# Altium PCB LMAT_AMT_V4.PcbDoc (part 1 of 2)
Units mm, origin at the board's own origin, x right, y up, seen from the top; angles counter-clockwise.
Board outline 36.5 x 40.75 mm, 4 copper layers (Top Layer, PWR, GND, Bottom Layer), stack 1.572 mm thick; 123 components, 51 nets, 267 pads, 150 vias.
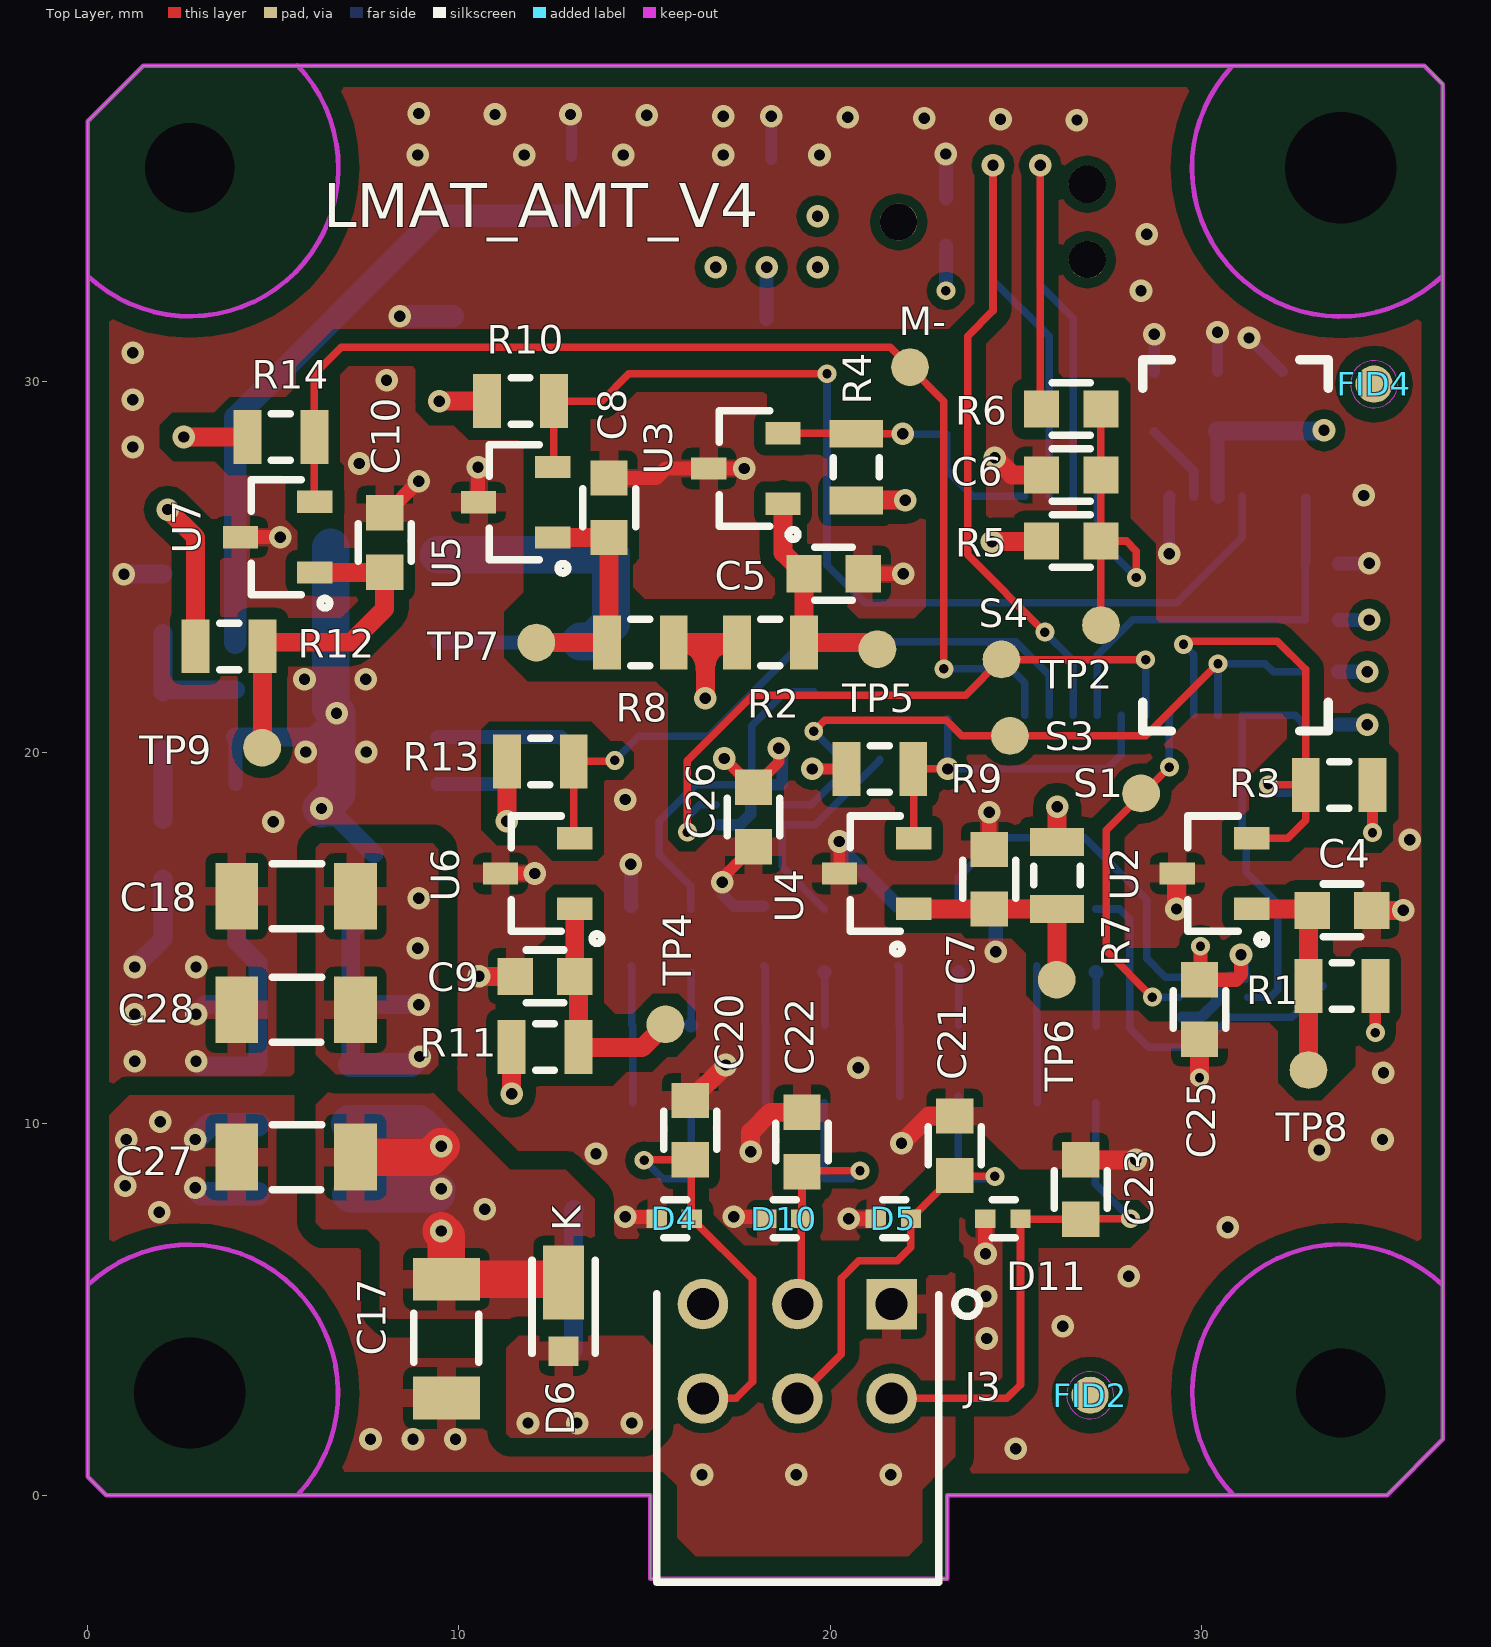
[diagram p0: Top Layer view]
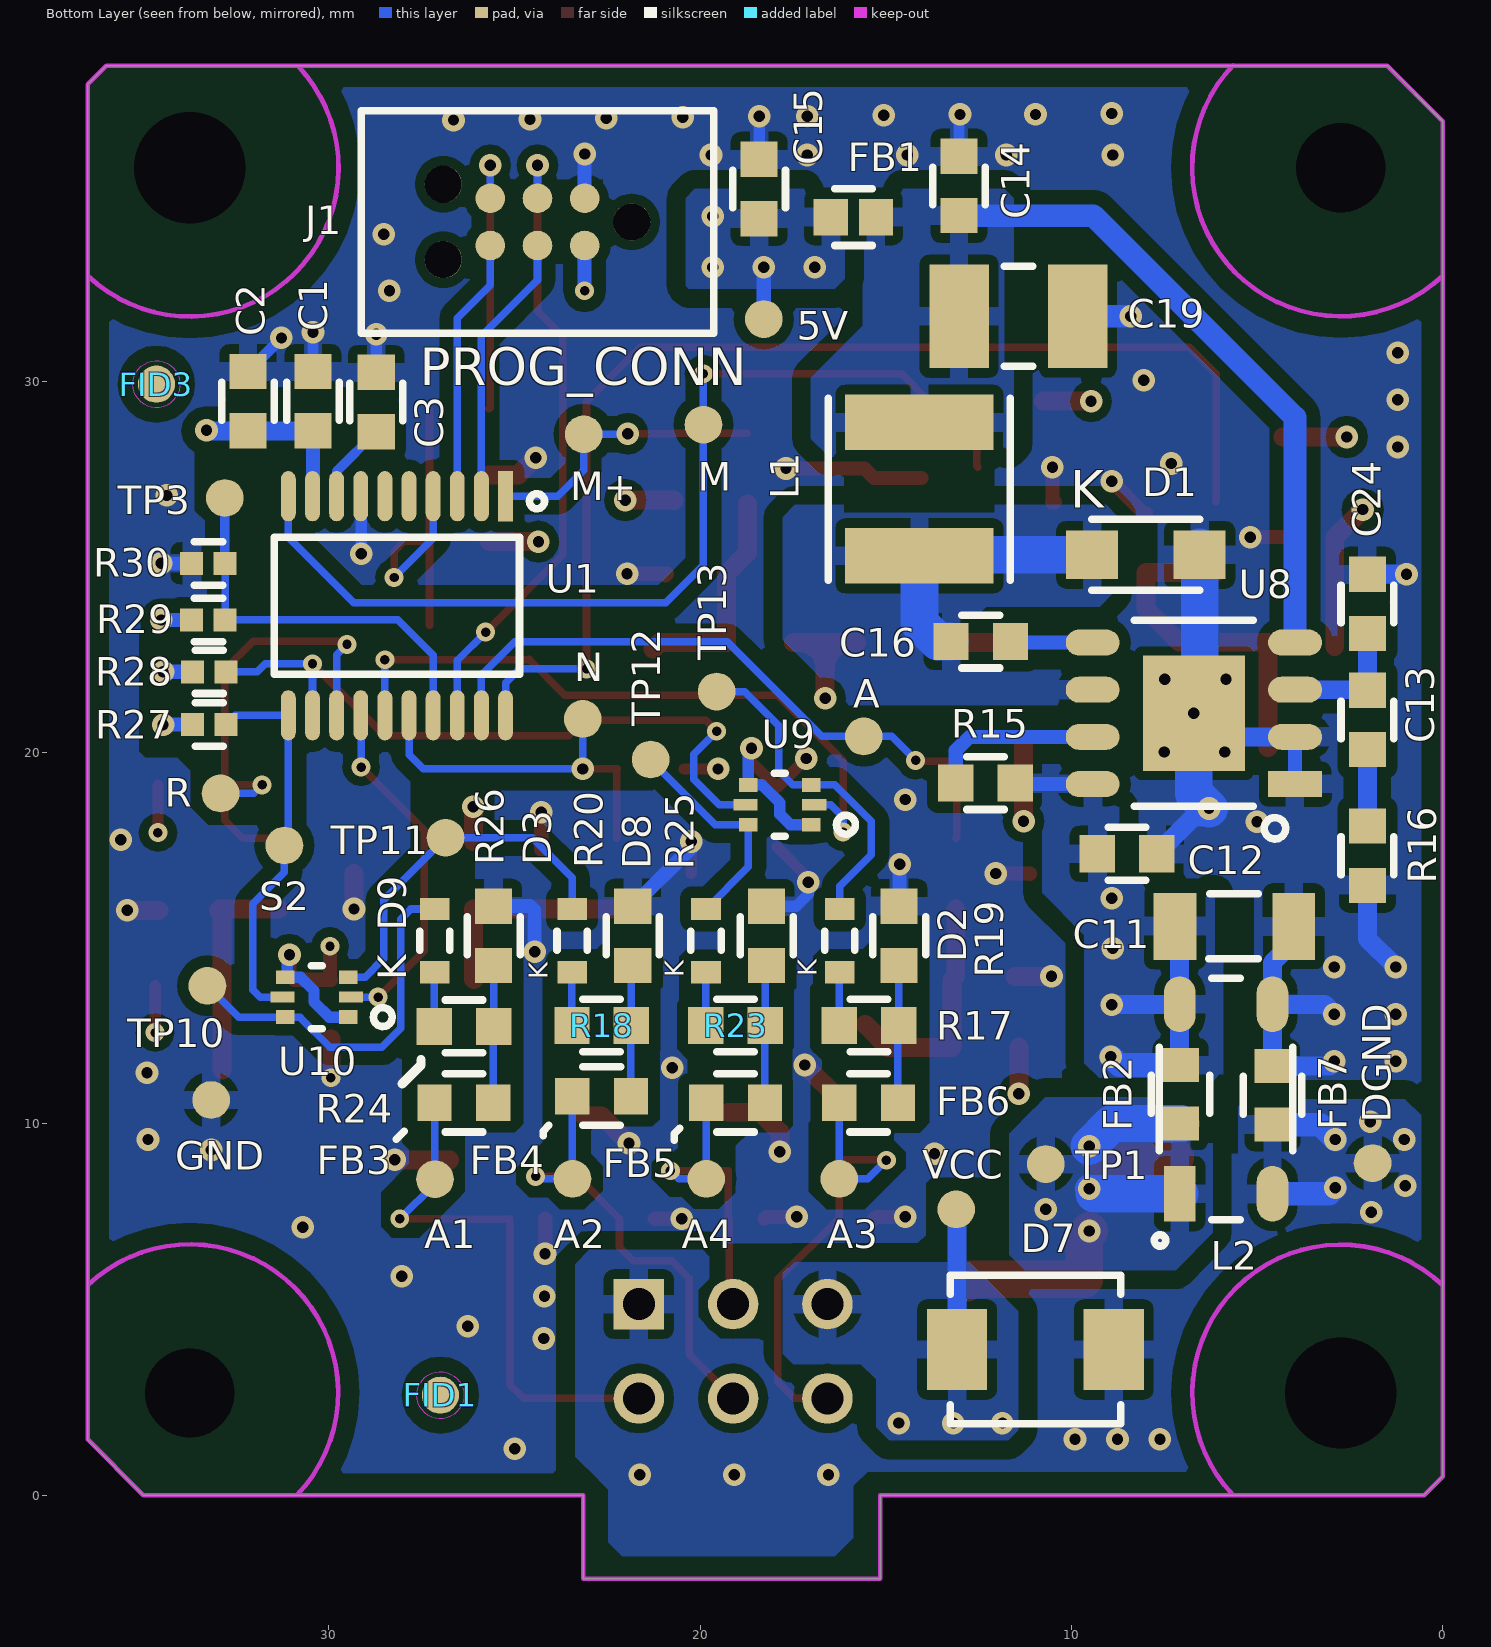
[diagram p1: Bottom Layer view, seen from below]
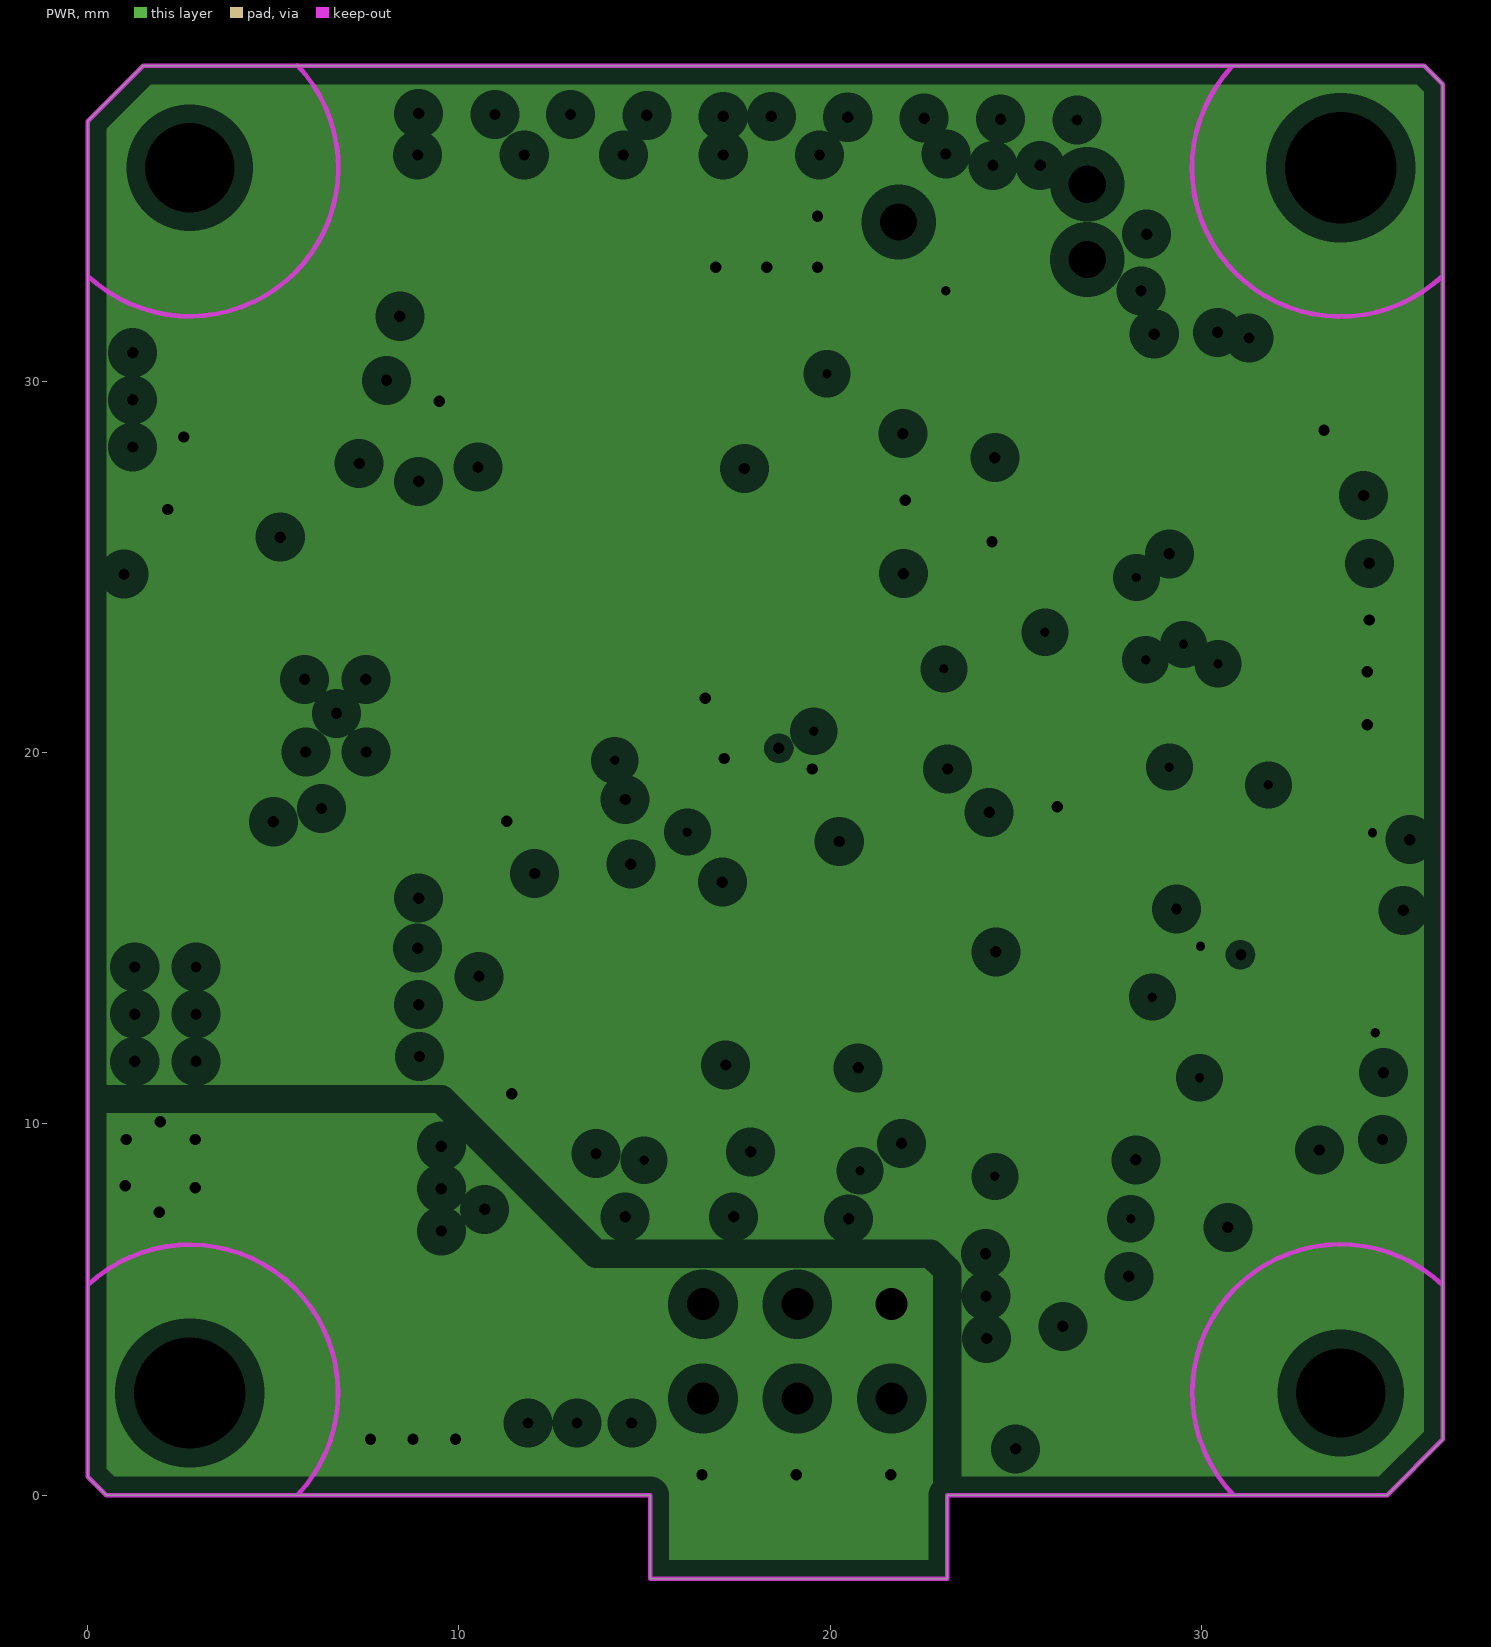
[diagram p2: PWR, clearances drawn from the general rule]
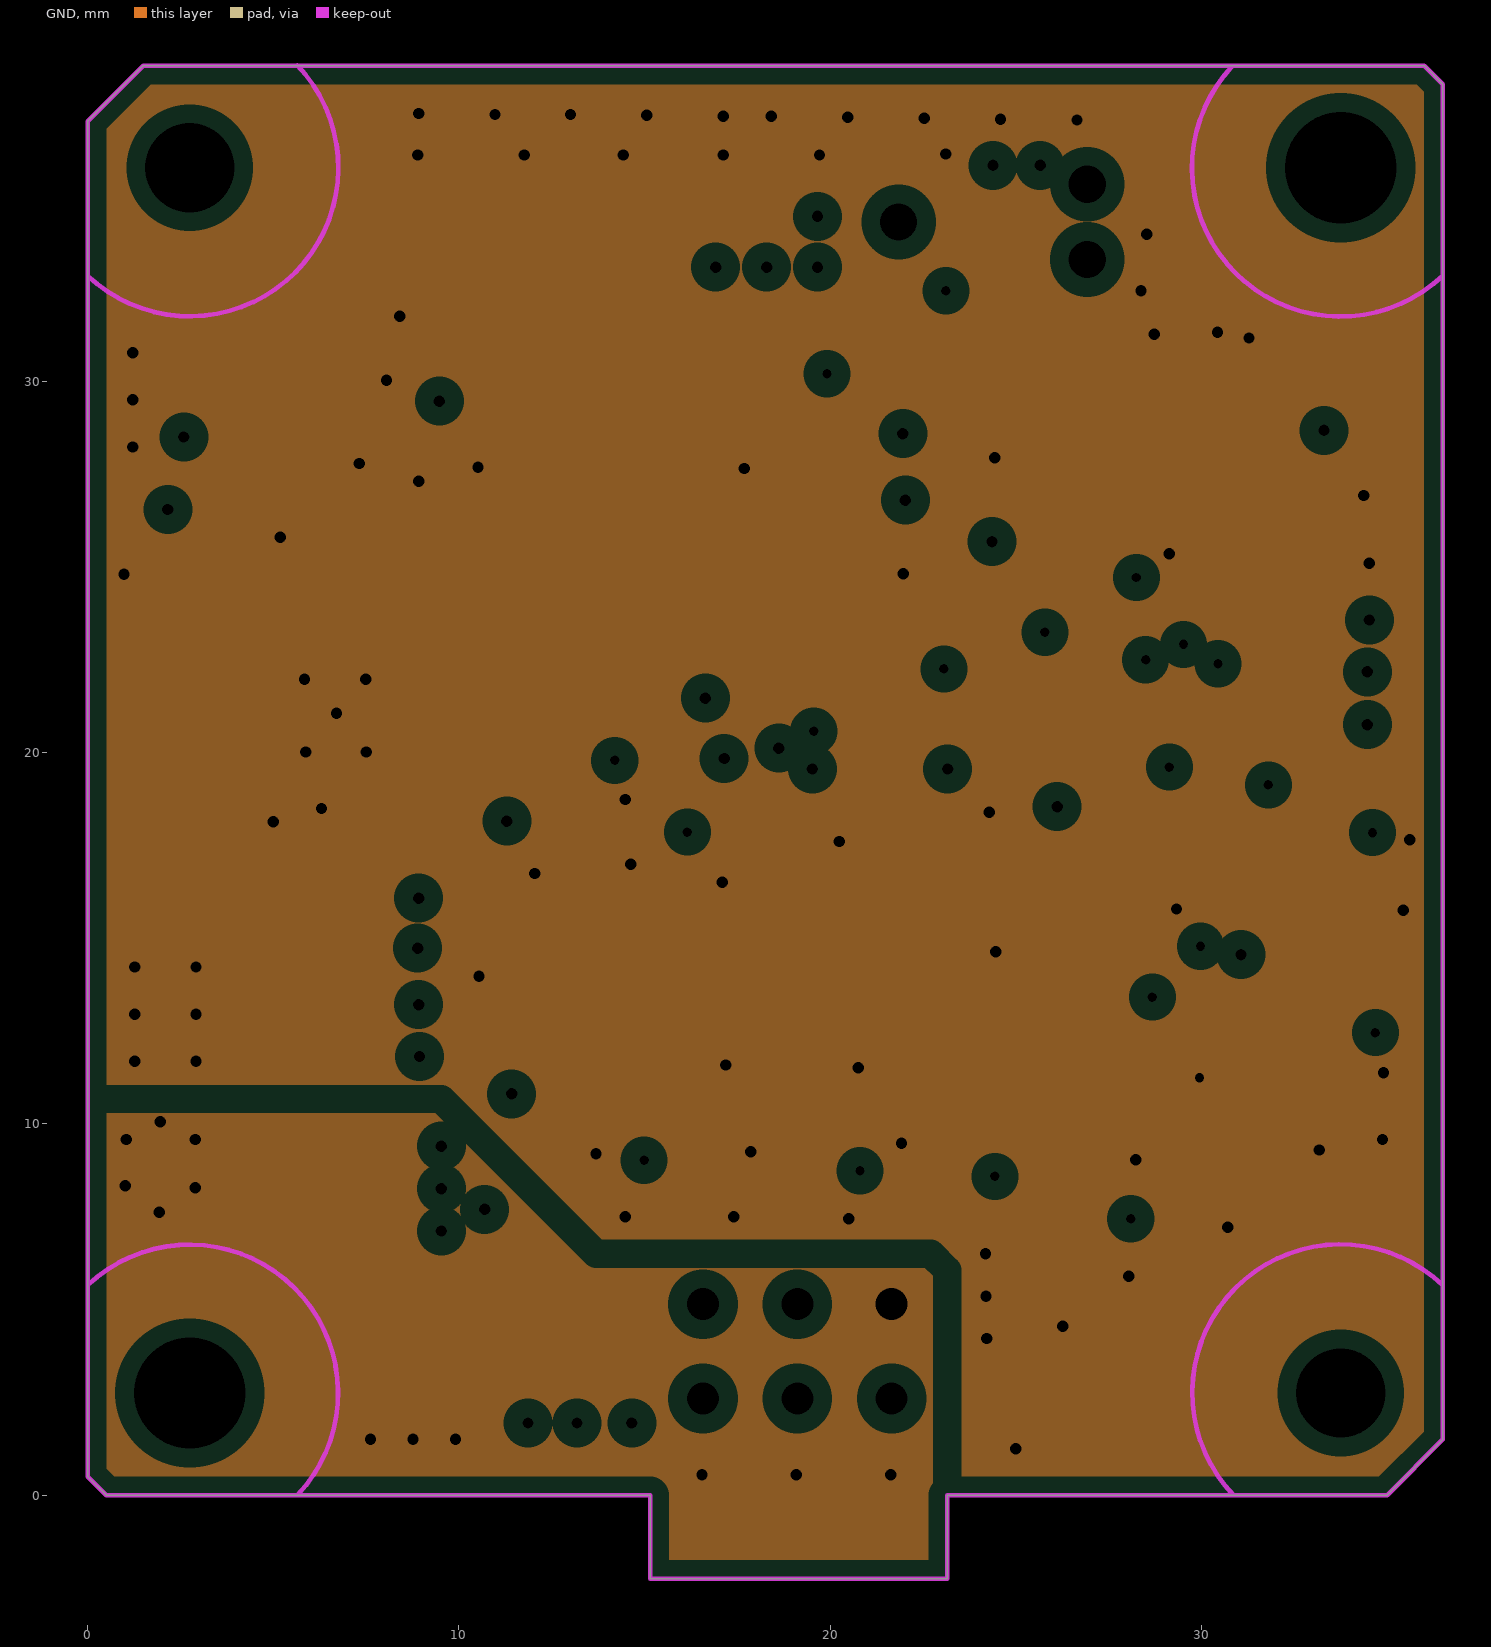
[diagram p3: GND, clearances drawn from the general rule]
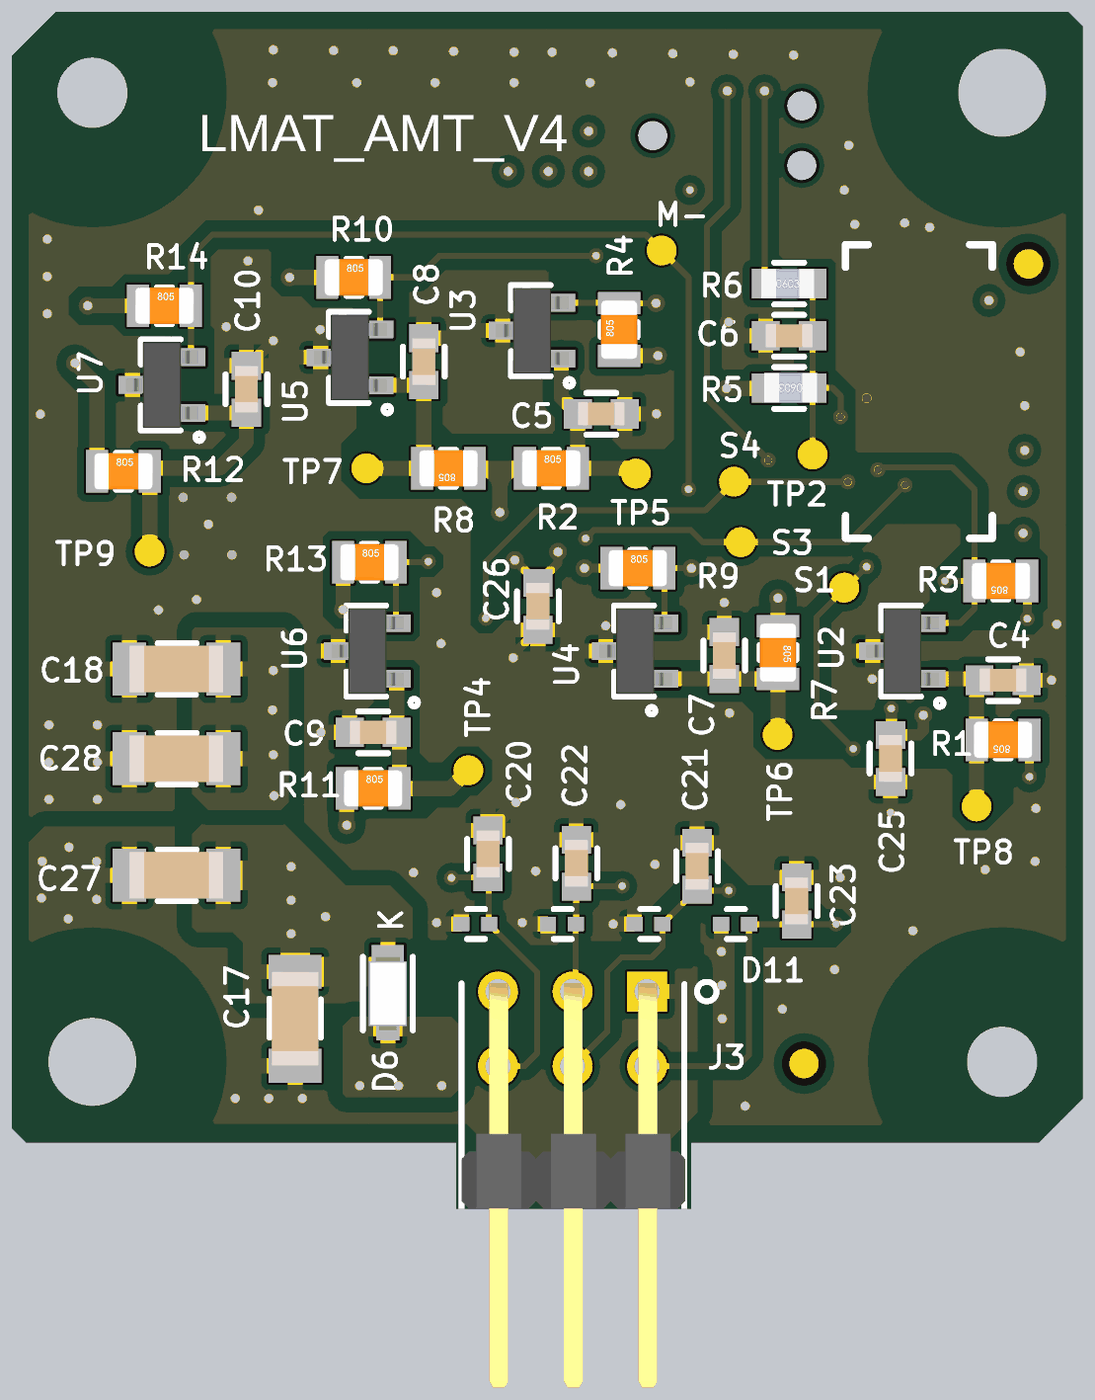
[diagram p5: 3D render of the assembled board from above, using the file's embedded part models]
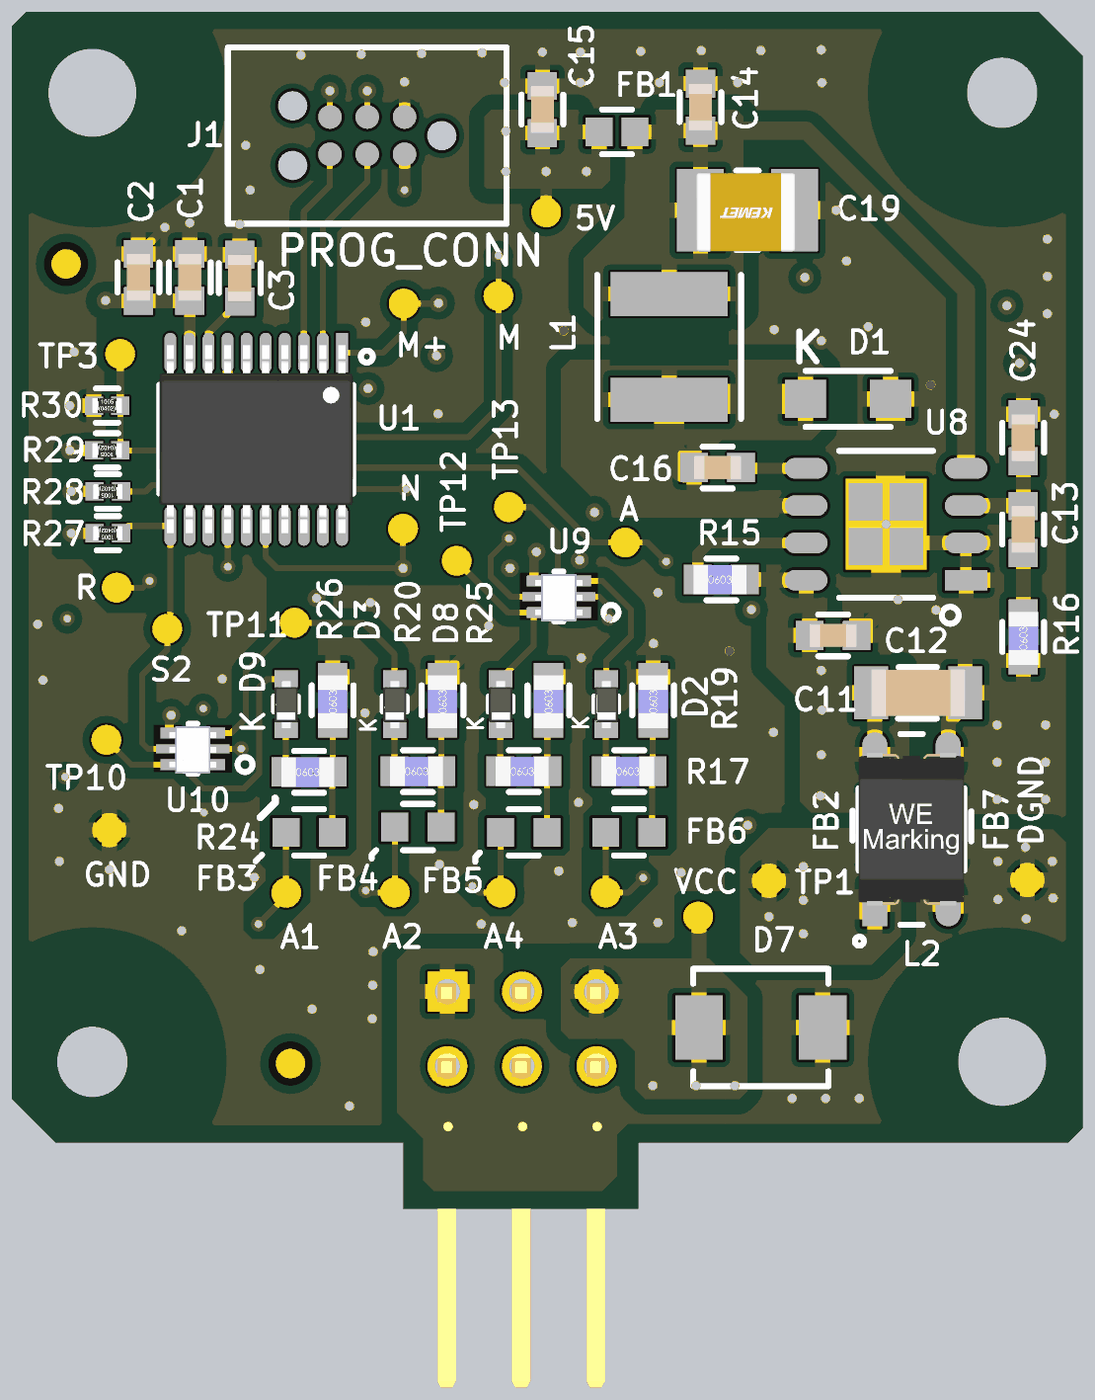
[diagram p6: 3D render of the assembled board from below, using the file's embedded part models]

## Layer stack, top to bottom
Top Solder: solder mask 0.02, Solder Resist, Dk 3.5
Top Layer: signal copper 0.035
Dielectric 1: prepreg 0.128, PP-006, Dk 4.2
Dielectric 2: prepreg 0.088, Dk 4.2
PWR: plane copper 0.035, net VCC_5V
Dielectric 3: core 1, FR-4, Dk 4.2
GND: plane copper 0.035, net GND
Dielectric 4: prepreg 0.088, PP-006, Dk 4.2
Dielectric 5: prepreg 0.128, Dk 4.2
Bottom Layer: signal copper 0.035
Bottom solder: solder mask 0.02, Solder Resist, Dk 3.5

## Board outline
0,0.5 0.5,0 15.15,0 15.15,-2.25 23.15,-2.25 23.15,0 35,0 36.5,1.5 36.5,38 36,38.5 1.5,38.5 0,37

## Design rules (kind name [scope] priority, off if disabled: settings)
AcuteAngle [All] p1: minimum=6.00000000000000E+0001 checktracksonly=TRUE
Clearance Clearance_keepout [(OnLayer('Keep-Out Layer'))] p1: gap=0.762 ignorepadtopadclearanceinfootprint=TRUE except(0: Arc-Text Arc-Hole Track-Text Track-Hole SMDPad-Text SMDPad-Hole THPad-Text THPad-Hole Via-Text Via-Hole Fill-Text Fill-Hole Poly-Text Poly-Hole Region-Text Region-Hole Text-Text Text-Hole; 0.254: Arc-Track Arc-SMDPad Arc-THPad Arc-Via Track-Track Track-SMDPad Track-THPad Track-Via SMDPad-Region; 0.381: Arc-Arc; 0.508: Arc-Poly Track-Poly; 0.635: Fill-Fill Poly-Poly)
Clearance [All] p2: gap=0.381 ignorepadtopadclearanceinfootprint=TRUE except(0: Arc-Hole Track-Hole SMDPad-Hole THPad-Hole Via-Hole Fill-Hole Poly-Hole Region-Hole Text-Hole; 0.203: Track-SMDPad SMDPad-Via; 0.254: Arc-Track Track-Track Track-Via Track-Region SMDPad-SMDPad SMDPad-Region THPad-Poly THPad-Region Via-Poly Via-Region; 0.305: SMDPad-Poly; 0.508: Poly-Poly)
ComponentClearance Choke [HasFootprint('EMS_744212331') vs HasFootprint('SMDL0603')] p1: gap=0 collisioncheckmode=3 verticalgap=0 showdistances=FALSE
ComponentClearance [All] p2: gap=0.508 collisioncheckmode=3 verticalgap=0.508 showdistances=FALSE
FanoutControl Fanout_Default [All] p1: bgadir=Out bgaviamode=Centered fanoutstyle=Auto fanoutdirection=Alternating viagrid=0.025 // Fanout_Default (Default Rule)
Height Bottom [All] p1: minheight=0 maxheight=5.5 prefheight=5
Height TOP [All] p2: minheight=0 maxheight=1.6 prefheight=1.5
Height [All] p3: minheight=0 maxheight=10 prefheight=5
HoleSize [All] p1: absolutevalues=TRUE maxlimit=25.4 minlimit=0.025 maxpercent=80.000 minpercent=20.000
HoleToHoleClearance [All] p1 off: gap=0.254 allowstackedmicrovias=TRUE
LayerPairs [All] p1 off: enforce=TRUE
MinimumAnnularRing [All] p1: minimumring=0.127
MinimumSolderMaskSliver "MinimumSolderMaskSliver_U9 and U10" [HasFootprint('SOTFL50P160X60-6N-PMDT670UPE,115')] p1: minsoldermaskwidth=0.043
MinimumSolderMaskSliver [All] p2: minsoldermaskwidth=0.076
PlaneClearance [All] p1: clearance=0.508
PlaneConnect [All] p1: planeconnectstyle=Direct reliefexpansion=0.508 reliefentries=4 reliefconductorwidth=0.254 reliefairgap=0.254
PolygonConnect C16_2 [IsNamedPolygon('NETC16_2_L04_P203')] p1: thpad.connectstyle=Relief thpad.reliefconductorwidth=0.254 thpad.reliefentries=4 thpad.polygonreliefangle="90 Angle" thpad.airgapwidth=0.254 smdpad.connectstyle=Relief smdpad.reliefconductorwidth=0.762 smdpad.reliefentries=4 smdpad.polygonreliefangle="90 Angle" smdpad.airgapwidth=0.254 via.connectstyle=Direct via.reliefconductorwidth=0.254 via.reliefentries=4 via.polygonreliefangle="90 Angle" via.airgapwidth=0.254
PolygonConnect PolygonConnect_Via [IsVia] p2: connectstyle=Direct reliefconductorwidth=0.254 reliefentries=4 polygonreliefangle="90 Angle" airgapwidth=0.254
PolygonConnect [All] p3: connectstyle=Relief reliefconductorwidth=0.508 reliefentries=4 polygonreliefangle="90 Angle" airgapwidth=0.254
RoutingVias [InNetClass('All Nets')and not InNetClass('PWR')] p1: holewidth=0.254 width=0.508 viastyle="Through Hole" minholewidth=0.254 minwidth=0.508 maxholewidth=0.508 maxwidth=1.016
RoutingVias RoutingVias_PWR [InNetClass('PWR')] p2: holewidth=0.305 width=0.61 viastyle="Through Hole" minholewidth=0.254 minwidth=0.508 maxholewidth=0.305 maxwidth=0.61
SilkToSilkClearance [All] p1: silktosilkclearance=0.076
SilkToSolderMaskClearance FB [HasFootprint('SMDL0603')] p1: minsilkscreentomaskgap=0 clearancetoexposedcopper=TRUE
SilkToSolderMaskClearance [IsPad] p2: minsilkscreentomaskgap=0.076 clearancetoexposedcopper=TRUE
SolderMaskExpansion [All] p1: expansion=0.102
UnpouredPolygon [All] p1: allowunpoured=TRUE allowshelved=TRUE
Width Width_PWR [InNetClass('PWR')] p1: maxlimit=1.27 minlimit=0.305 preferedwidth=0.381
Width [All] p2: maxlimit=5.08 minlimit=0.203 preferedwidth=0.381
14 further rules are at their usual default settings.

## Components (designator, comment, footprint, x,y, rotation, side; value= is the part's Value field where it differs from the comment)
5V "Test Point- 35mil" TP_40X40 18.288,31.674 r180 bottom locked
A "Test Point- 35mil" TP_40X40 15.596,20.434 r90 bottom locked
A1 "Test Point- 35mil" TP_40X40 27.144,8.509 r180 bottom locked
A2 "Test Point- 35mil" TP_40X40 23.442,8.517 r180 bottom locked
A3 "Test Point- 35mil" TP_40X40 16.256,8.517 r180 bottom locked
A4 "Test Point- 35mil" TP_40X40 19.837,8.517 r180 bottom locked
C1 "CAP CER 0.1UF 50V 10% X7R 0603" SMDC0603 30.429,29.464 r90 bottom locked value=0.1uF
C2 "CAP CER 1UF 25V X7R 0603" SMDC0603 32.182,29.464 r270 bottom locked value=1µF
C3 "CAP CER 1UF 25V X7R 0603" SMDC0603 28.727,29.439 r90 bottom locked value=1µF
C4 "CAP CER 0.047UF 50V X7R 0603" SMDC0603 33.782,15.748 r180 top locked value=0.047µF
C5 "CAP CER 0.047UF 50V X7R 0603" SMDC0603 20.091,24.816 r180 top locked value=0.047µF
C6 "CAP CER 0.1UF 50V 10% X7R 0603" SMDC0603 26.492,27.475 r180 top locked value=0.1uF
C7 "CAP CER 0.047UF 50V X7R 0603" SMDC0603 24.282,16.586 r270 top locked value=0.047µF
C8 "CAP CER 0.047UF 50V X7R 0603" SMDC0603 14.046,26.594 r270 top locked value=0.047µF
C9 "CAP CER 0.047UF 50V X7R 0603" SMDC0603 12.319,13.97 r0 top locked value=0.047µF
C10 "CAP CER 0.047UF 50V X7R 0603" SMDC0603 8.001,25.654 r270 top locked value=0.047µF
C11 "CAP CER 10UF 35V X7R 1206" SMDC1206 5.613,15.316 r0 bottom locked value=10uF
C12 "CAP CER 0.1UF 50V 10% X7R 0603" SMDC0603 8.509,17.272 r180 bottom locked value=0.1uF
C13 "CAP CER 0.022UF 50V 10% X7R 0603" SMDC0603 2.032,20.879 r270 bottom locked value=0.022uF
C14 "CAP CER 0.22UF 50V X7R 0603" SMDC0603 13.03,35.26 r270 bottom locked value=0.22µF
C15 "CAP CER 0.1UF 50V 10% X7R 0603" SMDC0603 18.415,35.179 r90 bottom locked value=0.1uF
C16 "CAP CER 0.22UF 50V X7R 0603" SMDC0603 12.446,22.987 r0 bottom locked value=0.22µF
C17 "CAP CER 10UF 35V X7R 1206" SMDC1206 9.661,4.216 r90 top locked value=10uF
C18 "CAP CER 10UF 35V X7R 1206" SMDC1206 5.613,16.129 r0 top locked value=10uF
C19 "CAP CER 47UF 16V X6S 1210" SMDC1210 11.43,31.75 r0 bottom locked value=47uF
C20 "CAP CER 10000PF 50V X8R 0603" SMDC0603 16.231,9.83 r270 top locked value=DNP
C21 "CAP CER 10000PF 50V X8R 0603" SMDC0603 23.355,9.41 r270 top locked value=DNP
C22 "CAP CER 10000PF 50V X8R 0603" SMDC0603 19.241,9.512 r270 top locked value=DNP
C23 "CAP CER 10000PF 50V X8R 0603" SMDC0603 26.746,8.23 r270 top locked value=DNP
C24 "CAP CER 0.022UF 50V 10% X7R 0603" SMDC0603 2.032,24.003 r90 bottom locked value=DNP
C25 "CAP CER 0.1UF 50V 10% X7R 0603" SMDC0603 29.947,13.081 r270 top locked value=0.1uF
C26 "CAP CER 0.1UF 50V 10% X7R 0603" SMDC0603 17.932,18.263 r270 top locked value=0.1uF
C27 "CAP CER 10UF 35V X7R 1206" SMDC1206 5.613,9.103 r0 top locked value=10uF
C28 "CAP CER 10UF 35V X7R 1206" SMDC1206 5.613,13.073 r0 top locked value=10uF
D1 "DIODE SCHOTTKY 40V 1A DO-219AB" SODFL370X110-2N 8.001,25.324 r180 bottom locked value=SS1FL4HM3/H
D2 "Diode Schottky 30V 100mA Surface Mount EMD2" SOD1700X70N-V2 16.243,14.935 r90 bottom locked value=RB501SM-30FHT2R
D3 "Diode Schottky 30V 100mA Surface Mount EMD2" SOD1700X70N-V2 23.451,14.935 r90 bottom locked value=RB501SM-30FHT2R
D4 "TVS DIODE 5V 17.5V SOD882T" SOD1510X40 15.799,7.442 r0 top locked value=ESDALC5-1BT2Y
D5 "TVS DIODE 5V 17.5V SOD882T" SOD1510X40 21.7,7.442 r0 top locked value=ESDALC5-1BT2Y
D6 "DIODE SCHOTTKY 150V 1A MICROSMP" "MICROSMP (DO-219AD)" 12.819,4.8 r270 top locked value=V1PM15HM3/H
D7 "TVS DIODE 23.1V 48.3V SMB" DIOM4336X26B 10.973,3.921 r0 bottom locked value=SM6T27CAY
D8 "Diode Schottky 30V 100mA Surface Mount EMD2" SOD1700X70N-V2 19.845,14.935 r90 bottom locked value=RB501SM-30FHT2R
D9 "Diode Schottky 30V 100mA Surface Mount EMD2" SOD1700X70N-V2 27.153,14.935 r90 bottom locked value=RB501SM-30FHT2R
D10 "TVS DIODE 5V 17.5V SOD882T" SOD1510X40 18.749,7.442 r0 top locked value=ESDALC5-1BT2Y
D11 "TVS DIODE 5V 17.5V SOD882T" SOD1510X40 24.65,7.442 r0 top locked value=ESDALC5-1BT2Y
DGND "Test Point- 35mil" TP_40X40 1.892,8.941 r90 bottom locked
FB1 "FERRITE BEAD 600 OHM 0603 1LN" SMDL0603#1 15.875,34.417 r0 bottom locked value="600 Ohms"
FB2 "FERRITE BEAD 600 OHM 0603 1LN" SMDL0603#2 7.061,10.795 r90 bottom locked value="600 Ohms"
FB3 "FERRITE BEAD 600 OHM 0603 1LN" SMDL0603#2 26.365,10.566 r0 bottom locked value="600 Ohms"
FB4 "FERRITE BEAD 600 OHM 0603 1LN" SMDL0603#2 22.657,10.744 r0 bottom locked value="600 Ohms"
FB5 "FERRITE BEAD 600 OHM 0603 1LN" SMDL0603#2 19.05,10.566 r0 bottom locked value="600 Ohms"
FB6 "FERRITE BEAD 600 OHM 0603 1LN" SMDL0603#2 15.469,10.566 r0 bottom locked value="600 Ohms"
FB7 "FERRITE BEAD 600 OHM 0603 1LN" SMDL0603#2 4.589,10.77 r90 bottom locked value="600 Ohms"
FID1 "FID40X40" FID40X40 27,2.692 r90 bottom locked
FID2 "FID40X40" FID40X40 27,2.692 r90 top locked
FID3 "FID40X40" FID40X40 34.646,29.921 r90 bottom locked
FID4 "FID40X40" FID40X40 34.646,29.921 r90 top locked
GND "Test Point- 35mil" TP_40X40 33.172,10.643 r90 bottom locked
J1 "J-LINK 6-PIN NEEDLE ADAPTER" "PRG_8.06.16 J-LINK 6-PIN NEEDLE ADAPTER" 24.384,34.29 r0 bottom locked value="8.06.16 J-LINK 6-PIN NEEDLE ADAPTER"
J3 "CONN HEADER R/A 6POS 2.54MM" HDRRA6W86P254_2X3_1344X254X528P_Modified 19.114,3.874 r180 top locked value=M20-9950345
L1 "FIXED IND 47UH 700MA 422.5 MOHM" INDC4949X310N 14.097,27.096 r90 bottom locked value=47UH
L2 "CMC 330UH 300MA 2LN 2 KOHM SMD" EMS_744212331 5.839,10.668 r270 bottom locked value=DNP
M "Test Point- 35mil" TP_40X40 19.914,28.829 r90 bottom locked
M+ "Test Point- 35mil" TP_40X40 23.139,28.572 r180 bottom locked
M- "Test Point- 35mil" TP_40X40 22.149,30.378 r90 top locked
N "Test Point- 35mil" TP_40X40 23.165,20.904 r90 bottom locked
R "Test Point- 35mil" TP_40X40 32.918,18.898 r180 bottom locked
R1 "RES SMD 100 OHM 1% 1/2W 0805" SMDR0805 33.782,13.716 r180 top locked value=100R
R2 "RES SMD 100 OHM 1% 1/2W 0805" SMDR0805 18.39,22.962 r0 top locked value=100R
R3 "RES SMD 1.2K OHM 5% 1/2W 0805" SMDR0805 33.706,19.126 r180 top locked value=1.2K
R4 "RES SMD 1.2K OHM 5% 1/2W 0805" SMDR0805 20.701,27.686 r90 top locked value=1.2K
R5 "RES SMD 47K OHM 1% 1/10W 0603" SMDR0603 26.492,25.697 r180 top locked value=47K
R6 "RES SMD 0.0OHM JUMPER 1/10W 0603" SMDR0603 26.492,29.253 r0 top locked value=0R
R7 "RES SMD 100 OHM 1% 1/2W 0805" SMDR0805 26.111,16.688 r270 top locked value=100R
R8 "RES SMD 100 OHM 1% 1/2W 0805" SMDR0805 14.884,22.962 r180 top locked value=100R
R9 "RES SMD 1.2K OHM 5% 1/2W 0805" SMDR0805 21.336,19.558 r0 top locked value=1.2K
R10 "RES SMD 1.2K OHM 5% 1/2W 0805" SMDR0805 11.659,29.464 r0 top locked value=1.2K
R11 "RES SMD 100 OHM 1% 1/2W 0805" SMDR0805 12.319,12.065 r0 top locked value=100R
R12 "RES SMD 100 OHM 1% 1/2W 0805" SMDR0805 3.81,22.86 r0 top locked value=100R
R13 "RES SMD 1.2K OHM 5% 1/2W 0805" SMDR0805 12.192,19.761 r0 top locked value=1.2K
R14 "RES SMD 1.2K OHM 5% 1/2W 0805" SMDR0805 5.207,28.499 r0 top locked value=1.2K
R15 "RES SMD 1M OHM 5% 1/10W 0603" SMDR0603 12.319,19.177 r180 bottom locked value=1M
R16 "RES SMD 22K OHM 1% 1/10W 0603" SMDR0603 2.032,17.221 r90 bottom locked value=22K
R17 "RES SMD 105 OHM 1% 1/10W 0603" SMDR0603 15.456,12.649 r180 bottom locked value="105 Ohms"
R18 "RES SMD 105 OHM 1% 1/10W 0603" SMDR0603 22.657,12.649 r180 bottom locked value="105 Ohms"
R19 "RES SMD 210 OHM 1% 1/10W 0603" SMDR0603 14.643,15.062 r90 bottom locked value="210 Ohms"
R20 "RES SMD 210 OHM 1% 1/10W 0603" SMDR0603 21.819,15.062 r90 bottom locked value="210 Ohms"
R23 "RES SMD 105 OHM 1% 1/10W 0603" SMDR0603 19.05,12.649 r180 bottom locked value="105 Ohms"
R24 "RES SMD 105 OHM 1% 1/10W 0603" SMDR0603 26.365,12.624 r180 bottom locked value="105 Ohms"
R25 "RES SMD 210 OHM 1% 1/10W 0603" SMDR0603 18.212,15.062 r90 bottom locked value="210 Ohms"
R26 "RES SMD 210 OHM 1% 1/10W 0603" SMDR0603 25.565,15.062 r90 bottom locked value="210 Ohms"
R27 "RES SMD 10K OHM 5% 1/10W 0402" SMDR0402 33.223,20.752 r0 bottom locked value=10K
R28 "RES SMD 10K OHM 5% 1/10W 0402" SMDR0402 33.223,22.174 r0 bottom locked value=10K
R29 "RES SMD 4.7K OHM 1% 1/10W 0402" SMDR0402 33.249,23.571 r0 bottom locked value=4.7K
R30 "RES SMD 4.7K OHM 1% 1/10W 0402" SMDR0402 33.249,25.095 r180 bottom locked value=DNP
S1 "Test Point- 35mil" TP_40X40 28.372,18.898 r0 top locked
S2 "Test Point- 35mil" TP_40X40 31.2,17.496 r180 bottom locked
S3 "Test Point- 35mil" TP_40X40 24.841,20.447 r0 top locked
S4 "Test Point- 35mil" TP_40X40 24.613,22.508 r0 top locked
TP1 "Test Point- 35mil" TP_40X40 10.693,8.915 r90 bottom locked
TP2 "Test Point- 35mil" TP_40X40 27.292,23.431 r90 top locked
TP3 "Test Point- 35mil" TP_40X40 32.804,26.854 r90 bottom locked
TP4 "Test Point- 35mil" TP_40X40 15.562,12.679 r90 top locked
TP5 "Test Point- 35mil" TP_40X40 21.271,22.784 r270 top locked
TP6 "Test Point- 35mil" TP_40X40 26.098,13.88 r90 top locked
TP7 "Test Point- 35mil" TP_40X40 12.086,22.962 r90 top locked
TP8 "Test Point- 35mil" TP_40X40 32.88,11.449 r270 top locked
TP9 "Test Point- 35mil" TP_40X40 4.699,20.127 r90 top locked
TP10 "Test Point- 35mil" TP_40X40 33.274,13.716 r270 bottom locked
TP11 "Test Point- 35mil" TP_40X40 26.86,17.704 r270 bottom locked
TP12 "Test Point- 35mil" TP_40X40 21.336,19.812 r90 bottom locked
TP13 "Test Point- 35mil" TP_40X40 19.558,21.641 r90 bottom locked
U1 "IC MCU 8BIT 8KB FLASH 20TSSOP" SOP65P640X120-20N 28.169,23.952 r270 bottom locked value=STM8AF6223PCU
U2 "MAGNETIC SWITCH UNIPOLAR SOT23-3" SOT95P248X115-3N 30.35,16.74 r180 top locked value=TLE49641MXTSA1
U3 "MAGNETIC SWITCH UNIPOLAR SOT23-3" SOT95P248X115-3N 17.73,27.65 r180 top locked value=TLE49641MXTSA1
U4 "MAGNETIC SWITCH UNIPOLAR SOT23-3" SOT95P248X115-3N 21.25,16.74 r180 top locked value=TLE49641MXTSA1
U5 "MAGNETIC SWITCH UNIPOLAR SOT23-3" SOT95P248X115-3N 11.53,26.74 r180 top locked value=TLE49641MXTSA1
U6 "MAGNETIC SWITCH UNIPOLAR SOT23-3" SOT95P248X115-3N 12.12,16.74 r180 top locked value=TLE49641MXTSA1
U7 "MAGNETIC SWITCH UNIPOLAR SOT23-3" SOT95P248X115-3N 5.12,25.8 r180 top locked value=TLE49641MXTSA1
U8 "IC REG BUCK 5V 1.8A 8DSO" SOIC127P600X170_HS-9N 6.706,21.057 r0 bottom locked value=TLE8366EV50XUMA1
U9 "MOSFET 2P-CH 20V 0.55A SOT666" SOTFL50P160X60-6N-PMDT670UPE,115 17.855,18.593 r0 bottom locked value=PMDT670UPE,115
U10 "MOSFET 2P-CH 20V 0.55A SOT666" SOTFL50P160X60-6N-PMDT670UPE,115 30.327,13.411 r0 bottom locked value=PMDT670UPE,115
VCC "Test Point- 35mil" TP_40X40 13.106,7.696 r90 bottom locked

## Footprints (in the part's own frame and the unit in brackets; to place one, negate y for a bottom-side part, rotate by r counter-clockwise, add the part's x,y. Pads: shape width x height; smd on the part's side, far side on the other; paste and mask are expansions set on the pad)
DIOM4336X26B [mm] "Molded Diode, 2-Leads, Body 4.32x3.63mm, IPC Low Density"
  rect 1.62x2.18 smd: 1(-2.11,0) 2(2.11,0)
  silkscreen extent -2.3,-2 2.3,2, body extent -2.52,-1.97 2.52,1.97, height 2.65
EMS_744212331 [mm]
  rect 1.5x0.85 smd mask+0.102: 1(2.55,-1.25)
  oval 1.5x0.85 smd mask+0.102: 3(2.55,1.25) 4(-2.55,1.25) 5(-2.55,-1.25)
  silkscreen extent -3.25,-1.93 3.96,1.8, body extent -2.6,-1.8 2.6,1.8, height 1.7
FID40X40 [mm]
  round 1 smd paste-2 mask+0.254: 0(0,0)
  Top Layer keep-out circle w0.025: c0,0 r0.635
HDRRA6W86P254_2X3_1344X254X528P_Modified [mm] "CONN HEADER R/A 6POS 2.54MM"
  rect 1.36x1.36 hole 0.86 mask+0.076: 1(-2.54,-1.27)
  round 1.36 hole 0.86 mask+0.076: 2(0,-1.27) 3(2.54,-1.27) 4(-2.54,1.27) 5(0,1.27) 6(2.54,1.27)
  silkscreen extent -4.9,-1.6 3.78,6.22, body extent -3.84,-1.55 3.78,12.21, height 5.08
INDC4949X310N [mm] "NRS5030T2R2NMGJ,FIXED IND 6.8UH 2.3A 52 MOHM SMD"
  rect 1.5x4 smd mask+0.076: 1(-1.8,0) 2(1.8,0)
  Top Layer pour cut-out: -0.635,2.032 0.635,2.032 0.635,-2.032 -0.635,-2.032
  silkscreen extent -2.45,-2.45 2.45,2.45, body extent -2.45,-2.45 2.45,2.45, height 3.1
"MICROSMP (DO-219AD)" [mm] "DIODE SCHOTTKY 150V 1A MICROSMP"
  rect 2x1.1 smd: 1(-0.925,0)
  rect 0.8x0.8 smd: 2(0.925,0)
  silkscreen extent -1.52,-0.85 0.98,0.85, body extent -1.53,-0.65 0.98,0.65, height 0.69
"PRG_8.06.16 J-LINK 6-PIN NEEDLE ADAPTER" [mm]
  round 1 hole 1 unplated: 0(-2.54,0) 0(2.54,1.016) 0(2.54,-1.016)
  round 0.8 smd: 1(-1.27,-0.635) 2(-1.27,0.635) 3(0,-0.635) 4(0,0.635) 5(1.27,-0.635) 6(1.27,0.635)
  Top Layer pour cut-out: -1.778,-1.143 -1.778,1.143 1.778,1.143 1.778,-1.143
  silkscreen extent -4.75,-3 4.75,3
SMDC0603 [mm]
  rect 0.95x1 smd mask+0.076: 1(-0.8,0) 2(0.8,0)
  Top Layer pour cut-out: -0.203,0.559 -0.203,-0.584 0.203,-0.584 0.203,0.559
  silkscreen extent -0.51,-0.71 0.51,0.71, body extent -0.8,-0.4 0.8,0.4, height 0.81
SMDC1206 [mm]
  rect 1.15x1.8 smd mask+0.076: 1(-1.6,0) 2(1.6,0)
  Top Layer pour cut-out: -0.533,0.889 0.533,0.889 0.533,-0.914 -0.533,-0.914
  silkscreen extent -0.64,-0.87 0.69,0.87, body extent -1.6,-0.8 1.6,0.8, height 0.79
SMDC1210 [mm] "GRM32ER71A476KE15L, CAP CER 47UF 10V X7R 1210"
  rect 1.6x2.8 smd mask+0.076: 1(-1.6,0) 2(1.6,0)
  Top Layer pour cut-out: -0.508,1.35 0.381,1.35 0.381,-1.35 -0.508,-1.35
  silkscreen extent -0.38,-1.35 0.38,1.35, body extent -1.65,-1.29 1.75,1.41, height 1.41
SMDL0603#1 [mm] "Chip Inductor, 2-Leads, Body 1.60x0.80mm, IPC Medium Density"
  rect 0.92x0.98 smd: 1(-0.61,0) 2(0.61,0)
  silkscreen extent -0.51,-0.76 0.51,0.76, body extent -0.87,-0.48 0.87,0.48, height 1
SMDL0603#2 [mm] "Chip Inductor, 2-Leads, Body 1.60x0.80mm, IPC Medium Density"
  rect 0.92x0.98 smd: 1(-0.79,0) 2(0.79,0)
  silkscreen extent -0.51,-0.79 0.51,0.79, body extent -0.87,-0.48 0.87,0.48, height 1
SMDR0402 [mm]
  rect 0.62x0.62 smd mask+0.076: 1(-0.45,0) 2(0.45,0)
  Top Layer pour cut-out: -0.102,0.381 0.076,0.381 0.076,-0.381 -0.102,-0.381
  silkscreen extent -0.38,-0.58 0.38,0.58, body extent -0.5,-0.25 0.5,0.25, height 0.35
SMDR0603 [mm]
  rect 0.95x1 smd mask+0.076: 1(-0.8,0) 2(0.8,0)
  Top Layer pour cut-out: -0.254,0.61 0.254,0.61 0.254,-0.61 -0.254,-0.61
  silkscreen extent -0.51,-0.71 0.51,0.71, body extent -0.95,-0.5 0.85,0.5, height 0.32
SMDR0805 [mm]
  rect 0.75x1.45 smd mask+0.076: 1(-0.9,0) 2(0.9,0)
  Top Layer pour cut-out: -0.381,0.787 0.406,0.787 0.406,-0.762 0.381,-0.787 -0.381,-0.787
  silkscreen extent -0.25,-0.63 0.25,0.63, body extent -1,-0.62 1,0.63, height 0.78
SOD1510X40 [mm]
  rect 0.55x0.5 smd mask+0.076: 1(-0.475,0) 2(0.475,0)
  silkscreen extent -0.28,-0.51 0.33,0.51, body extent -0.53,-0.32 0.53,0.32, height 0.4
SOD1700X70N-V2 [mm]
  rect 0.6x0.8 smd mask+0.076: 1(-0.85,0) 2(0.85,0)
  silkscreen extent -0.25,-0.41 0.25,0.41, body extent -0.82,-0.41 0.78,0.39, height 0.7
SODFL370X110-2N [mm] "SODFL, 2-Leads, Body 1.80x3.70mm, IPC Medium Density"
  rect 1.4x1.3 smd: 1(1.45,0) 2(-1.45,0)
  Top Layer pour cut-out: -0.395,-0.95 -0.395,0.95 0.316,0.95 0.316,-0.95
  silkscreen extent -1.45,-0.96 1.45,0.96, body extent -1.85,-0.95 1.85,0.95, height 1.1
SOIC127P600X170_HS-9N [mm] "SOIC, 8-Leads, Body 4.90x3.90mm, Pitch 1.27mm, Thermal Pad 3.10x2.75mm, IPC Medium Density"
  rect 1.45x0.7 smd: 1(-2.725,1.905)
  oval 1.45x0.7 smd: 2(-2.725,0.635) 3(-2.725,-0.635) 4(-2.725,-1.905) 5(2.725,-1.905) 6(2.725,-0.635) 7(2.725,0.635) 8(2.725,1.905)
  rect 2.75x3.1 smd paste-3 mask+0.102: 9(0,0)
  silkscreen extent -2.47,-2.5 1.6,3.39, body extent -3,-2.5 3,2.5, height 1.7
SOP65P640X120-20N [mm] "TSOP, 20-Leads, Body 6.50x4.40mm, Pitch 0.65mm, IPC Medium Density"
  rect 1.35x0.4 smd mask+0.076: 1(-2.95,2.925)
  oval 1.35x0.4 smd mask+0.076: 2(-2.95,2.275) 3(-2.95,1.625) 4(-2.95,0.975) 5(-2.95,0.325) 6(-2.95,-0.325) 7(-2.95,-0.975) 8(-2.95,-1.625) 9(-2.95,-2.275) 10(-2.95,-2.925) 11(2.95,-2.925) 12(2.95,-2.275) 13(2.95,-1.625) 14(2.95,-0.975) 15(2.95,-0.325) 16(2.95,0.325) 17(2.95,0.975) 18(2.95,1.625) 19(2.95,2.275) 20(2.95,2.925)
  silkscreen extent -3.02,-3.3 1.85,3.97, body extent -3.2,-3.3 3.2,3.3, height 1.2
SOT95P248X115-3N [mm] "SOT23, 3-Leads, Body 2.95x2.48mm, Pitch 0.95mm, IPC Medium Density"
  rect 0.95x0.6 smd: 1(-1,0.95) 2(-1,-0.95) 3(1,0)
  silkscreen extent -1.4,-1.55 0.71,1.9, body extent -1.25,-1.46 1.23,1.46, height 1.03
SOTFL50P160X60-6N-PMDT670UPE,115 [mm] "SOTFL, 6-Leads, Body 1.60x1.60mm, Pitch 0.50mm, IPC Medium Density"
  rect 0.5x0.375 smd mask+0.076: 1(-0.85,0.538) 3(-0.85,-0.537) 4(0.85,-0.537) 6(0.85,0.538)
  rect 0.65x0.3 smd mask+0.076: 2(-0.925,0) 5(0.925,0)
  silkscreen extent -2.03,-0.85 0.15,0.85, body extent -0.8,-0.76 0.8,0.84, height 0.57
TP_40X40 [mil]
  round 40 smd paste-200 mask+3: 1(0,0)

## Part data
5V A A1 A2 A3 A4 DGND GND M M+ M- N R S1 S2 S3 S4 TP1 TP2 TP3 TP4 TP5 TP6 TP7 TP8 TP9 TP10 TP11 TP12 TP13 VCC: library part EMS-TP35MIL-S, Internal Part Number=EMS-TP35MIL-S, Part Type="Test Point- 35mil"
C1 C6 C12 C15 C25 C26: library part ECA0U10K50V0-SC, Manufacturer="TDK Corporation", Manufacturer Part Number=CGA3E2X7R1H104K080AA, Temp Co=X7R, Vendor Part Number=445-5666-1-ND, 1st Auxiliary Field=50V, 2nd Auxiliary Field=±10%, 3rd Auxiliary Field="RoHS Compliant", Component Height (mm)=0.90mm, Internal Part Number=ECA0U10K50V0-SC, Part Type="CAP CER 0.1UF 50V X7R 0603", Vendor Name=Digi-Key
C2 C3: library part ECA1U00L25V0-SC, Manufacturer="TDK Corporation", Manufacturer Part Number=CGA3E1X7R1E105K080AE, Temp Co="-55°C ~ 125°C", Vendor Part Number=445-173628-1-ND, 1st Auxiliary Field=25V, 2nd Auxiliary Field=±10%, 3rd Auxiliary Field="RoHS Compliant", Component Height (mm)=0.95mm, Internal Part Number=ECA1U00L25V0-SC, Part Type="CAP CER 1UF 25V X7R 0603", Vendor Name=Digi-Key
C4 C5 C7 C8 C9 C10: library part ECA47N0L50V-SC, Manufacturer="TDK Corporation", Manufacturer Part Number=CGA3E2X7R1H473K080AA, Temp Co="-55°C ~ 125°C", Vendor Part Number=445-5664-1-ND, 1st Auxiliary Field=50V, 2nd Auxiliary Field=±10%, 3rd Auxiliary Field="RoHS Compliant", Component Height (mm)=0.9mm, Internal Part Number=ECA47N0L50V-SC, Part Type="CAP CER 0.047UF 50V X7R 0603", Vendor Name=Digi-Key
C11 C17 C18 C27 C28: library part ECA10U0L35V0-SG, Manufacturer="TDK Corporation", Manufacturer Part Number=CGA5L1X7R1V106K160AC, Temp Co="-55°C ~ 125°C", Vendor Part Number=445-174428-1-ND, 1st Auxiliary Field=35V, 2nd Auxiliary Field=±10%, 3rd Auxiliary Field="RoHS Compliant", 4th Auxiliary Field=AEC-Q200, Component Height (mm)=1.80mm, Internal Part Number=ECA10U0L35V0-SG, Part Type="CAP CER 10UF 35V X7R 1206", Vendor Name=Digi-Key
C13 C24: library part ECA0U022K50V0-SC, Manufacturer="TDK Corporation", Manufacturer Part Number=CGA3E2X7R1H223K080AA, Temp Co=X7R, Vendor Part Number=445-5663-1-ND, 1st Auxiliary Field=50V, 2nd Auxiliary Field=±10%, Component Height (mm)=0.90mm, Internal Part Number=ECA0U022K50V0-SC, Part Type="CAP CER 0.022UF 50V X7R 0603", Vendor Name=Digi-Key
C14 C16: library part ECA0U22L50V0-SC, Manufacturer="Murata Electronics North America", Manufacturer Part Number=GCJ188R71H224KA01D, Temp Co="-55°C ~ 125°C", Vendor Part Number=490-14410-1-ND, 1st Auxiliary Field=50V, 2nd Auxiliary Field=±10%, 3rd Auxiliary Field="RoHS Compliant", Component Height (mm)=0.90mm, Internal Part Number=ECA0U22L50V0-SC, Part Type="CAP CER 0.22UF 50V X7R 0603", Vendor Name=Digi-Key
C19: library part ECA47U0L16V0-SH, Manufacturer="Murata Electronics North America", Manufacturer Part Number=GRT32EC81C476KE13L, Temp Co="-55°C ~ 105°C", Vendor Part Number=490-12494-1-ND, 1st Auxiliary Field=16V, 2nd Auxiliary Field=±10%, 3rd Auxiliary Field="RoHS Compliant", 4th Auxiliary Field=AEC-Q200, Component Height (mm)=2.70mm, Internal Part Number=ECA47U0L16V0-SH, Part Type="CAP CER 47UF 16V X6S 1210", Vendor Name=Digi-Key
C20 C21 C22 C23: library part ECA0U01L50V0-SC, Manufacturer="TDK Corporation", Manufacturer Part Number=CGA3E2X8R1H103K080AA, Temp Co="-55°C ~ 150°C", Vendor Part Number=445-5892-1-ND, 1st Auxiliary Field=50V, 2nd Auxiliary Field=±10%, 3rd Auxiliary Field="RoHS Compliant", 4th Auxiliary Field=AEC-Q200, Component Height (mm)=0.80mm, Internal Part Number=ECA0U01L50V0-SC, Part Type="CAP CER 10000PF 50V X8R 0603", Vendor Name=Digi-Key
D1: library part EDDVS1A0040V0-S, Manufacturer="Vishay Semiconductor Diodes Division", Manufacturer Part Number=SS1FL4HM3/H, Temp Co="-55°C ~ 150°C", Vendor Part Number=SS1FL4HM3/HGICT-ND, 1st Auxiliary Field=40V, 2nd Auxiliary Field=1A, 3rd Auxiliary Field="RoHS Compliant", Component Height (mm)=1.08mm, Internal Part Number=EDDVS1A0040V0-S, Part Type="DIODE SCHOTTKY 40V 1A DO-219AB", Vendor Name=Digi-Key
D2 D3 D8 D9: library part EDDR0A1030V0-S, Manufacturer="Rohm Semiconductor", Manufacturer Part Number=RB501SM-30FHT2R, Temp Co="125°C (Max)", Vendor Part Number=RB501SM-30FHT2RCT-ND, 1st Auxiliary Field=30V, 2nd Auxiliary Field=100mA, 3rd Auxiliary Field="RoHS Compliant", Component Height (mm)=0.70mm, Internal Part Number=EDDR0A1030V0-S, Part Type="Diode Schottky 30V 100mA Surface Mount EMD2", Vendor Name=Digi-Key
D4 D5 D10 D11: library part EDDST9A005V00-S, Manufacturer=STMicroelectronics, Manufacturer Part Number=ESDALC5-1BT2Y, Temp Co="-50°C ~ 125°C (TJ)", Vendor Part Number=497-14998-1-ND, 1st Auxiliary Field=5V, 2nd Auxiliary Field=9A, 3rd Auxiliary Field="RoHS Compliant", 4th Auxiliary Field=AEC-Q101, Component Height (mm)=0.40mm, Internal Part Number=EDDST9A005V00-S, Part Type="TVS DIODE 5V 17.5V SOD882T", Vendor Name=Digi-Key
D6: library part EDDVS1A00150V-S, Manufacturer="Vishay Semiconductor Diodes Division", Manufacturer Part Number=V1PM15HM3/H, Temp Co="-40°C ~ 175°C", Vendor Part Number=V1PM15HM3/HGICT-ND, 1st Auxiliary Field=150V, 2nd Auxiliary Field=1A, 3rd Auxiliary Field="RoHS Compliant", 4th Auxiliary Field=AEC-Q101, Component Height (mm)=0.73mm, Internal Part Number=EDDVS1A00150V-S, Part Type="DIODE SCHOTTKY 150V 1A MICROSMP", Vendor Name=Digi-Key
D7: library part EDDST83A025V7-S, Manufacturer=STMicroelectronics, Manufacturer Part Number=SM6T27CAY, Temp Co="-55°C ~ 150°C (TJ)", Vendor Part Number=497-10798-1-ND, 1st Auxiliary Field=25.7V, 2nd Auxiliary Field=600W, 3rd Auxiliary Field="RoHS Compliant", Component Height (mm)=2.65mm, Internal Part Number=EDDST83A025V7-S, Part Type="TVS DIODE 23.1V 48.3V SMB", Vendor Name=Digi-Key
FB1 FB2 FB3 FB4 FB5 FB6 FB7: library part EIN600R1A00-SC, Manufacturer="Würth Elektronik", Manufacturer Part Number=782633601, Temp Co="-55°C ~ 125°C", Vendor Part Number=732-6703-1-ND, 1st Auxiliary Field=1A, 2nd Auxiliary Field="600 Ohms @ 100MHz", 3rd Auxiliary Field="ROHS3 Compliant", 4th Auxiliary Field=AEC-Q200, Component Height (mm)=1.00mm, Internal Part Number=EIN600R1A00-SC, Part Type="FERRITE BEAD 600 OHM 0603 1LN", Vendor Name=Digi-Key
FID1 FID2 FID3 FID4: library part FID_40X40
J1: library part "EMS-8.06.16 J-LINK 6-PIN NEEDLE ADAPTER", Manufacturer="Segger Microcontroller Systems", Manufacturer Part Number="8.06.16 J-LINK 6-PIN NEEDLE ADAPTER", Vendor Part Number=899-1051-ND, 1st Auxiliary Field=J-Link, 3rd Auxiliary Field="RoHS Compliant", Internal Part Number="EMS-8.06.16 J-LINK 6-PIN NEEDLE ADAPTER", Part Type="J-LINK 6-PIN NEEDLE ADAPTER", Vendor Name=Digi-Key
J3: library part ECN-M20-9950345-0003-0060, Manufacturer="Harwin Inc.", Manufacturer Part Number=M20-9950345, Temp Co="-40°C ~ 105°C", Vendor Part Number=952-2092-ND, 1st Auxiliary Field=6pos, 2nd Auxiliary Field="2 rows", 3rd Auxiliary Field="RoHS Compliant", Component Height (mm)=5.08mm, Internal Part Number=ECN-M20-9950345-0003-0060, Part Type="CONN HEADER R/A 6POS 2.54MM", Vendor Name=Digi-Key
L1: library part EIN47U0N950M-S, Manufacturer="Taiyo Yuden", Manufacturer Part Number=NRS5030T470MMGJV, Temp Co="-40°C ~ 125°C", Vendor Part Number=587-3604-1-ND, 1st Auxiliary Field=950mA, 2nd Auxiliary Field=±20%, 3rd Auxiliary Field="RoHS Compliant", 4th Auxiliary Field=AEC-Q200, Component Height (mm)=3.00mm, Internal Part Number=EIN47U0N950M-S, Part Type="FIXED IND 47UH 700MA 422.5 MOHM", Vendor Name=Digi-Key
L2: library part EIN330U300M-S, Manufacturer="Würth Elektronik", Manufacturer Part Number=744212331, Temp Co="-40°C ~ 105°C", Vendor Part Number=732-3939-1-ND, 1st Auxiliary Field=300mA, 2nd Auxiliary Field="330µH @ 100kHz", 3rd Auxiliary Field="ROHS3 Compliant", Component Height (mm)=1.8mm, Internal Part Number=EIN330U300M-S, Part Type="CMC 330UH 300MA 2LN 2 KOHM SMD", Vendor Name=Digi-Key
R1 R2 R7 R8 R11 R12: library part ERE100RG120-SE, Manufacturer="Panasonic Electronic Components", Manufacturer Part Number=ERJ-P06F1000V, Temp Co="-55°C ~ 155°C", Vendor Part Number=P16057CT-ND, 1st Auxiliary Field=0.5W, 2nd Auxiliary Field=±1%, 3rd Auxiliary Field="RoHS Compliant", 4th Auxiliary Field=AEC-Q200, Component Height (mm)=0.70mm, Internal Part Number=ERE100RG120-SE, Part Type="RES SMD 100 OHM 1% 1/2W 0805", Vendor Name=Digi-Key
R3 R4 R9 R10 R13 R14: library part ERE1K20G102-SE, Manufacturer="Panasonic Electronic Components", Manufacturer Part Number=ERJ-P06J122V, Temp Co="-55°C ~ 155°C", Vendor Part Number=P1.2KADCT-ND, 1st Auxiliary Field=0.5W, 2nd Auxiliary Field=±5%, 3rd Auxiliary Field="RoHS Compliant", Component Height (mm)=0.70mm, Internal Part Number=ERE1K20G102-SE, Part Type="RES SMD 1.2K OHM 5% 1/2W 0805", Vendor Name=Digi-Key
R5: library part ERE47K0G110-SC, Manufacturer=Yageo, Manufacturer Part Number=AT0603FRE0747KL, Temp Co="-55°C ~ 155°C", Vendor Part Number=YAG2129CT-ND, 1st Auxiliary Field=0.1W, 2nd Auxiliary Field=±1%, 3rd Auxiliary Field="RoHS Compliant", Component Height (mm)=0.55mm, Internal Part Number=ERE47K0G110-SC, Part Type="RES SMD 47K OHM 1% 1/10W 0603", Vendor Name=Digi-Key
R6: library part ERE0R00110-SC, Manufacturer="Panasonic Electronic Components", Manufacturer Part Number=ERJ-3GEY0R00V, Vendor Part Number=P0.0GCT-ND, 1st Auxiliary Field=0.1W, 2nd Auxiliary Field=Jumper, Component Height (mm)=0.55mm, Internal Part Number=ERE0R00110-SC, Part Type="RES SMD 0.0OHM JUMPER 1/10W 0603", Vendor Name=Digi-Key
R15: library part ERE1M00K110-SC, Manufacturer="Vishay Dale", Manufacturer Part Number=RCA06031M00JNEA, Temp Co="-55°C ~ 155°C", Vendor Part Number=541-2216-1-ND, 1st Auxiliary Field=0.1W, 2nd Auxiliary Field=±5%, 3rd Auxiliary Field="RoHS Compliant", 4th Auxiliary Field=AEC-Q200, Component Height (mm)=0.50mm, Internal Part Number=ERE1M00K110-SC, Part Type="RES SMD 1M OHM 5% 1/10W 0603", Vendor Name=Digi-Key
R16: library part ERE22K0G110-SC, Manufacturer="Panasonic Electronic Components", Manufacturer Part Number=ERJ-3EKF2202V, Temp Co="-55°C ~ 155°C", Vendor Part Number=P22.0KHCT-ND, 1st Auxiliary Field=0.1W, 2nd Auxiliary Field=±1%, 3rd Auxiliary Field="RoHS Compliant", 4th Auxiliary Field=AEC-Q200, Component Height (mm)=0.55mm, Internal Part Number=ERE22K0G110-SC, Part Type="RES SMD 22K OHM 1% 1/10W 0603", Vendor Name=Digi-Key
R17 R18 R23 R24: library part ERE105RG110-SC, Manufacturer="Panasonic Electronic Components", Manufacturer Part Number=ERJ-3EKF1050V, Temp Co="-55°C ~ 155°C", Vendor Part Number=P105HCT-ND, 1st Auxiliary Field=0.1W, 2nd Auxiliary Field=±1%, 3rd Auxiliary Field="RoHS Compliant", 4th Auxiliary Field=AEC-Q200, Component Height (mm)=0.55mm, Internal Part Number=ERE105RG110-SC, Part Type="RES SMD 105 OHM 1% 1/10W 0603", Vendor Name=Digi-Key
R19 R20 R25 R26: library part ERE210RG110-SC, Manufacturer="Panasonic Electronic Components", Manufacturer Part Number=ERJ-3EKF2100V, Temp Co="-55°C ~ 155°C", Vendor Part Number=P210HCT-ND, 1st Auxiliary Field=0.1W, 2nd Auxiliary Field=±1%, 3rd Auxiliary Field="RoHS Compliant", 4th Auxiliary Field=AEC-Q200, Component Height (mm)=0.55mm, Internal Part Number=ERE210RG110-SC, Part Type="RES SMD 210 OHM 1% 1/10W 0603", Vendor Name=Digi-Key
R27 R28: library part ERE10K0K110-SB, Manufacturer="Panasonic Electronic Components", Manufacturer Part Number=ERJ-2GEJ103X, Temp Co=±200ppm/°C, Vendor Part Number=P10KJCT-ND, 1st Auxiliary Field=0.1W, 2nd Auxiliary Field=±5%, 3rd Auxiliary Field="RoHS Compliant", Component Height (mm)=0.40mm, Internal Part Number=ERE10K0K110-SB, Part Type="RES SMD 10K OHM 5% 1/10W 0402", Vendor Name=Digi-Key
R29 R30: library part ERE4K70G110-SB, Alternate Part number=RK73H1ETTP4701F, Manufacturer="Panasonic Electronic Components", Manufacturer Part Number=ERJ-2RKF4701X, Temp Co=±100ppm/°C, Vendor Part Number=P4.70KLCT-ND, 1st Auxiliary Field=0.1W, 2nd Auxiliary Field=±1%, 3rd Auxiliary Field="RoHS Compliant", 4th Auxiliary Field=AEC-Q200, Component Height (mm)=0.40mm, Internal Part Number=ERE4K70G110-SB, Part Type="RES SMD 4.7K OHM 1% 1/10W 0402", Vendor Name=Digi-Key
U1: library part EICSTMTSSOP-20-1691, Manufacturer=STMicroelectronics, Manufacturer Part Number=STM8AF6223PCU, Temp Co="-40°C ~ 125°C (TA)", Vendor Part Number=497-17896-ND, 1st Auxiliary Field="3V ~ 5.5V", 2nd Auxiliary Field=8-Bit, 3rd Auxiliary Field="RoHS Compliant", Component Height (mm)=1.2mm, Internal Part Number=EICSTMTSSOP-20-1691, Part Type="IC MCU 8BIT 8KB FLASH 20TSSOP", Vendor Name=Digi-Key
U2 U3 U4 U5 U6 U7: library part EICITSOT23-3-1528, Manufacturer="Infineon Technologies", Manufacturer Part Number=TLE49641MXTSA1, Temp Co="-40°C ~ 170°C (TJ)", Vendor Part Number=TLE49641MXTSA1CT-ND, 1st Auxiliary Field="3 V ~ 32 V", 2nd Auxiliary Field=2.5mA, 3rd Auxiliary Field="RoHS Compliant", Component Height (mm)=1.15mm, Internal Part Number=EICITSOT23-3-1528, Part Type="MAGNETIC SWITCH UNIPOLAR SOT23-3", Vendor Name=Digi-Key
U8: library part EICITSOIC-08-0001, Manufacturer="Infineon Technologies", Manufacturer Part Number=TLE8366EV50XUMA1, Temp Co="-40°C ~ 150°C (TJ)", Vendor Part Number=TLE8366EV50XUMA1CT-ND, 1st Auxiliary Field=45V, 2nd Auxiliary Field=1.8A, 3rd Auxiliary Field="RoHS Compliant", 4th Auxiliary Field=AEC-Q100, Component Height (mm)=1.7mm, Internal Part Number=EICITSOIC-08-0001, Part Type="IC REG BUCK 5V 1.8A 8DSO", Vendor Name=Digi-Key
U9 U10: library part EICNUSOT666-06-0004, Manufacturer="Nexperia USA Inc.", Manufacturer Part Number=PMDT670UPE,115, Temp Co="-55°C ~ 150°C (TJ)", Vendor Part Number=1727-1334-1-ND, 1st Auxiliary Field=20V, 2nd Auxiliary Field=550mA, 3rd Auxiliary Field="RoHS Compliant", 4th Auxiliary Field=AEC-Q101, Component Height (mm)=0.6mm, Internal Part Number=EICNUSOT666-06-0004, Part Type="MOSFET 2P-CH 20V 0.55A SOT666", Vendor Name=Digi-Key

## Free pads (board coordinates)
  round 0.102 hole 3 unplated: MH(2.75,2.75) MH(33.75,35.75)
  round 0.102 hole 2.4 unplated: MH(2.75,35.75) MH(33.75,2.75)

## Via types
v1: diameter 0.61, hole 0.305, Top Layer to Bottom Layer, tented both sides, 128 vias
v2: diameter 0.508, hole 0.254, Top Layer to Bottom Layer, tented both sides, 22 vias

## Nets (pads, with @x,y where several pads share a name; then routed paths per layer and width w, separated by ;. In a path a pad name is that pad's centre, name@x,y a point inside that pad or via, vN(x,y) a via of type N, cw(c..) or ccw(c..) an arc to the next point about the centre after c; other vN are vias at no path point)
AUTOMATIC: A.1 R13.2 U1.19 U6.2 | length 17.7
  Top Layer w0.203: U6.2@13.12,17.69 13.092,17.718 R13.2@13.092,19.761 14.173,19.761 v2(14.199,19.787)
  Bottom Layer w0.203: v2(14.199,19.787) 14.846,20.434 A.1@15.596,20.434 16.726,20.434 19.279,22.987 24.994,22.987 25.894,22.087 U1.19@25.894,21.002
DEBUG: R29.1 R30.2 TP3.1 U1.17 | length 10.9
  Bottom Layer w0.203: U1.17@27.194,21.002 27.194,22.622 28.143,23.571 R29.1@32.799,23.571 R30.2@32.799,25.095
  Bottom Layer w0.254: R30.2@32.799,25.095 32.804,25.101 TP3.1@32.804,26.854
DGND: C17.1 C27.1 D7.1 DGND.1 FB7.1 J3.1 L2.3 | length 3.6
  Bottom Layer w0.635: v1(2.896,8.28) 3.058,8.118 L2.3@4.589,8.118 ; v1(2.896,9.576) 3.299,9.98 FB7.1@4.589,9.98
  other v1: 16.548,0.546 19.088,0.546 21.628,0.546 7.62,1.508 8.763,1.508 9.906,1.508 1.93,7.62 1.016,8.331 1.041,9.576 1.956,10.058
GND: C1.2 C2.1 C3.2 C4.1 C5.1 C6.2 C7.1 C8.1 C9.1 C10.1 C11.1 C12.2 C14.1 C15.2 C18.1 C19.1 C20.1 C21.1 C22.1 C23.1 C24.2 C25.2 C26.2 C28.1 D1.1 D4.1 D5.1 D10.1 D11.1 FB7.2 GND.1 J1.1 L2.4 R16.1 R19.2 R20.2 R25.2 R26.2 R30.1 U1.7 U2.3 U3.3 U4.3 U5.3 U6.3 U7.3 U8.1 U8.2 U8.9 | length 70.1
  Top Layer w0.305: v1(17.094,16.51) 17.094,16.624 C26.2@17.932,17.463 ; v1(20.244,17.602) 20.244,16.746 U4.3@20.25,16.74
  Top Layer w0.381: U7.3@4.12,25.8 v1(5.188,25.8) ; C10.1@8.001,26.454 8.064,26.454 v1(8.915,27.305) ; v1(10.516,27.686) 10.516,26.81 10.446,26.74 U5.3@10.53,26.74 ; U6.3@11.125,16.735 U6.3@11.12,16.74 v1(12.041,16.74) ; C8.1@14.046,27.394 15.316,27.394 15.572,27.65 U3.3@16.73,27.65 v1(17.689,27.65) ; v1(14.478,7.493) 15.258,7.493 15.316,7.434 D4.1@15.324,7.442 ; v1(17.399,7.493) 18.224,7.493 D10.1@18.274,7.442 ; v1(20.498,7.442) D5.1@21.225,7.442 ; C5.1@20.942,24.765 C5.1@20.891,24.816 v1(21.971,24.816) ; D11.1@24.175,7.442 24.175,6.508 v1(24.181,6.502) ; C7.1@24.282,17.386 v1(24.282,18.39)
  Top Layer w0.508: v1(10.541,13.97) C9.1@11.519,13.97 ; C20.1@16.231,10.63 v1(17.183,11.582) ; v1(17.856,9.246) 17.856,9.779 18.389,10.312 C22.1@19.241,10.312 ; v1(21.92,9.474) 22.656,10.21 C21.1@23.126,10.21 ; v1(24.435,27.94) 24.9,27.475 C6.2@25.692,27.475 ; C23.1@26.746,9.03 v1(28.232,9.03) ; v1(29.326,15.787) U2.3@29.326,16.74 ; v2(29.947,11.239) C25.2@29.947,12.281 ; C4.1@34.582,15.748 v1(35.433,15.748)
  Bottom Layer w0.305: v1(13.005,37.186) 13.03,37.16 C14.1@13.03,36.06 ; v1(17.094,16.51) 17.094,16.18 17.412,15.862 R25.2@18.212,15.862 ; C15.2@18.415,35.979 v1@18.415,37.059 ; C3.2@28.727,30.239 v1(28.727,31.267) ; v1(29.134,25.349) 29.134,26.892 U1.7@29.144,26.902 ; C1.2@30.429,30.264 v1(30.429,31.318) ; v1(31.28,31.166) C2.1@32.182,30.264
  Bottom Layer w0.381: U8.1@3.981,19.152 U8.2@3.981,20.422 ; v1(14.63,16.993) 14.63,15.875 R19.2@14.643,15.862 ; v1(20.244,17.602) 20.244,17.437 R20.2@21.819,15.862 ; J1.1@23.114,34.925 v1(23.114,36.119) ; v1(24.46,14.63) 24.46,15.737 24.585,15.862 R26.2@25.565,15.862 ; R30.1@33.699,25.095 v1(34.519,25.095)
  Bottom Layer w0.508: v1(0.978,24.803) C24.2@2.032,24.803 ; v1(1.27,14.224) 2.032,14.986 R16.1@2.032,16.421 R16.1@2.032,16.599 ; v1(2.921,11.684) 3.045,11.56 FB7.2@4.589,11.56 ; v1(2.921,12.954) 3.185,13.218 L2.4@4.589,13.218 ; U8.2@3.981,20.422 6.071,20.422 v1(6.706,21.057) ; C11.1@4.013,15.316 4.013,14.91 4.589,14.334 L2.4@4.589,13.218 ; FB7.2@4.589,11.56 L2.4@4.589,13.218 ; v1@6.299,18.364 v1(6.299,18.491) ; v1@6.401,18.263 6.718,18.263 C12.2@7.709,17.272
  Bottom Layer w0.61: v1(8.407,31.75) C19.1@9.83,31.75
  Bottom Layer w1.016: v1(6.299,18.491) 6.706,18.898 v1(6.706,21.057) 6.551,21.211 D1.1@6.551,25.324 D1.1@6.551,25.527
  other v1: 24.994,1.245 24.213,4.216 26.264,4.547 24.197,5.359 28.042,5.893 30.709,7.214 13.691,9.195 33.172,9.296 34.874,9.576 34.9,11.379 20.752,11.506 1.27,11.684 1.27,12.954 2.921,14.224 35.611,17.653 5.004,18.136 14.478,18.732 5.878,20.015 7.504,20.015 5.842,21.971 7.493,21.971 34.366,26.924 7.313,27.785 1.212,28.227 1.212,29.497 8.052,30.023 1.212,30.767 28.372,32.436 28.524,33.96 8.89,36.093 11.76,36.093 14.427,36.093 17.12,36.093 19.71,36.093 26.645,37.033 24.587,37.059 22.53,37.084 20.472,37.109 17.12,37.135 18.415,37.135 15.062,37.16 10.973,37.186 8.915,37.211
M+: M+.1 R4.2 U1.1 U3.2 | length 7.8
  Top Layer w0.203: U3.2@18.73,28.6 20.687,28.6 R4.2@20.701,28.586 v1(21.957,28.586)
  Bottom Layer w0.203: v1(21.957,28.586) 21.971,28.572 M+.1@23.139,28.572 23.139,27.597 23.834,26.902 U1.1@25.244,26.902
M-: M-.1 R14.2 U1.20 U7.2 | length 31.7
  Top Layer w0.203: U7.2@6.12,26.75 6.107,26.763 R14.2@6.107,28.499 6.107,30.186 6.833,30.912 21.615,30.912 M-.1@22.149,30.378 23.063,29.464 v2(23.063,22.25)
  Bottom Layer w0.203: v2(23.063,22.25) 24.867,22.25 25.244,21.873 U1.20@25.244,21.002
MANUAL: M.1 R10.2 U1.10 U5.2 | length 28
  Top Layer w0.203: U5.2@12.53,27.69 12.559,27.719 R10.2@12.559,29.464 13.843,29.464 14.58,30.201 v2(19.914,30.201)
  Bottom Layer w0.203: v2(19.914,30.201) M.1@19.914,28.829 19.914,25.044 20.93,24.028 29.327,24.028 31.094,25.795 U1.10@31.094,26.902
NetC3_1: C3.1 U1.8 | length 2.2
  Bottom Layer w0.254: C3.1@28.727,28.639 29.794,27.572 U1.8@29.794,26.902
NetC4_2: C4.2 R1.2 TP8.1 U2.1 | length 6
  Top Layer w0.508: U2.1@31.35,15.79 32.94,15.79 C4.2@32.982,15.748 32.882,15.648 R1.2@32.882,13.716 32.882,11.451 TP8.1@32.88,11.449
NetC5_2: C5.2 R2.2 TP5.1 U3.1 | length 6.1
  Top Layer w0.508: U3.1@18.73,26.7 18.73,25.377 C5.2@19.291,24.816 R2.2@19.29,22.962 ; R2.2@19.315,22.987 R2.2@19.29,22.962 ; TP5.1@21.271,22.784 21.093,22.962 R2.2@19.29,22.962 R2.2@19.29,22.962
NetC7_2: C7.2 R7.2 TP6.1 U4.1 | length 5.8
  Top Layer w0.508: U4.1@22.25,15.79 24.279,15.79 C7.2@24.282,15.786 24.284,15.788 R7.2@26.111,15.788 26.111,13.892 TP6.1@26.098,13.88
NetC8_2: C8.2 R8.2 TP7.1 U5.1 | length 6.3
  Top Layer w0.508: TP7.1@12.086,22.962 R8.2@13.984,22.962 14.046,23.023 C8.2@14.046,25.794 14.042,25.79 U5.1@12.53,25.79
NetC9_2: C9.2 R11.2 TP4.1 U6.1 | length 6.4
  Top Layer w0.508: U6.1@13.12,15.79 13.12,13.971 C9.2@13.119,13.97 13.219,13.87 R11.2@13.219,12.065 13.232,12.052 14.935,12.052 TP4.1@15.562,12.679
NetC10_2: C10.2 R12.2 TP9.1 U7.1 | length 9.4
  Top Layer w0.508: TP9.1@4.71,20.127 R12.2@4.71,22.86 4.71,22.969 7.094,22.969 7.997,23.872 7.997,24.85 U7.1@6.12,24.85
NetC13_1: C13.1 C24.1 U8.3 | length 3.5
  Bottom Layer w0.508: C24.1@2.032,23.203 C13.1@2.032,21.679 2.032,21.628 2.096,21.692 U8.3@3.981,21.692
NetC13_2: C13.2 R16.2 | length 1.9
  Bottom Layer w0.508: R16.2@2.032,18.199 C13.2@2.032,20.079
NetC14_2: C14.2 C19.2 FB1.1 L1.2 U8.4 | length 17.4
  Bottom Layer w0.61: U8.4@3.981,22.962 3.981,29.025 9.416,34.46 C14.2@13.03,34.46
NetC16_1: C16.1 U8.5 | length 2.2
  Bottom Layer w0.381: U8.5@9.431,22.962 11.621,22.962 C16.1@11.646,22.987
NetC16_2: C16.2 D1.2 L1.1 U8.6 | length 7.5
  Bottom Layer w1.016: D1.2@9.451,25.324 14.07,25.324 L1.1@14.097,25.297 14.097,23.485 13.599,22.987 C16.2@13.284,22.987
NetC17_2: C17.2 C27.2 D6.1 FB2.1 L2.1 TP1.1 | length 12.2
  Top Layer w1.016: C27.2@7.213,9.103 9.23,9.103 v1(9.525,9.398) ; v1(9.525,7.112) 9.661,6.976 C17.2@9.661,5.816 12.727,5.816 D6.1@12.819,5.725
  Bottom Layer w0.762: v1@9.388,8.118 v1(9.525,8.255)
  Bottom Layer w1.016: FB2.1@7.061,10.005 8.918,10.005 v1(9.525,9.398) ; L2.1@7.089,8.118 v1@9.388,8.118
  other v1: 10.693,7.696
NetD2_1: D2.1 R17.1 | length 1.5
  Bottom Layer w0.203: D2.1@16.243,14.085 16.256,14.073 R17.1@16.256,12.649
  Bottom Layer w0.381: R17.1@16.243,12.662 R17.1@16.256,12.649
NetD2_2: D2.2 TP13.1 U9.3 | length 9
  Bottom Layer w0.203: D2.2@16.243,15.785 16.243,16.396 15.392,17.247 15.392,18.147 16.375,19.13 U9.3@17.005,19.13 17.504,19.13 17.882,19.507 17.882,20.726 18.796,21.641 TP13.1@19.558,21.641
NetD3_1: D3.1 R18.1 | length 1.4
  Bottom Layer w0.203: R18.1@23.457,12.649 D3.1@23.457,14.073
  Bottom Layer w0.381: D3.1@23.451,14.085 D3.1@23.457,14.079
NetD3_2: D3.2 TP11.1 U10.3 | length 9.8
  Bottom Layer w0.203: D3.2@23.451,15.785 23.451,16.625 24.531,17.704 TP11.1@26.86,17.704 28.524,16.04 28.524,14.453 29.029,13.948 U10.3@29.477,13.948
NetD6_2: D6.2 D7.2 J3.3 VCC.1 | length 3.8
  Bottom Layer w0.508: D7.2@13.083,3.921 13.083,7.673 VCC.1@13.106,7.696 ; J3.3@16.573,5.143 J3.3@16.586,5.156
  other v1: 11.862,1.94 13.183,1.94 14.656,1.94
NetD8_1: D8.1 R23.1 | length 1.4
  Bottom Layer w0.203: R23.1@19.85,12.649 D8.1@19.85,14.073
  Bottom Layer w0.381: D8.1@19.845,14.085 D8.1@19.85,14.079
NetD8_2: D8.2 TP12.1 U9.6 | length 6.1
  Bottom Layer w0.203: D8.2@19.845,15.785 18.705,16.924 U9.6@18.705,18.055 19.597,18.055 21.336,19.794 TP12.1@21.336,19.812
NetD9_1: D9.1 R24.1 | length 1.4
  Bottom Layer w0.203: R24.1@27.165,12.624 D9.1@27.165,14.047
  Bottom Layer w0.381: D9.1@27.153,14.085 D9.1@27.165,14.073
NetD9_2: D9.2 TP10.1 U10.6 | length 10.1
  Bottom Layer w0.203: D9.2@27.153,15.785 27.795,15.785 28.067,15.514 28.067,12.573 28.575,12.065 29.972,12.065 30.78,12.873 U10.6@31.177,12.873 32.431,12.873 TP10.1@33.274,13.716
NetFB3_1: FB3.1 R24.2 R26.1 | length 3.7
  Bottom Layer w0.203: R24.2@25.565,12.624 R26.1@25.565,14.262 ; FB3.1@25.575,10.566 R24.2@25.575,12.624
NetFB4_1: FB4.1 R18.2 R20.1 | length 3.5
  Bottom Layer w0.203: R20.1@21.819,14.262 21.857,14.224 R18.2@21.857,12.649 21.867,12.64 FB4.1@21.867,10.744
NetFB5_1: FB5.1 R23.2 R25.1 | length 3.7
  Bottom Layer w0.203: R25.1@18.212,14.262 18.25,14.224 R23.2@18.25,12.649 18.26,12.64 FB5.1@18.26,10.566
NetFB6_1: FB6.1 R17.2 R19.1 | length 3.7
  Bottom Layer w0.203: R19.1@14.643,14.262 14.656,14.249 R17.2@14.656,12.649 14.679,12.627 FB6.1@14.679,10.566
NetJ1_5: J1.5 R6.1 | length 7.5
  Top Layer w0.203: v1(25.654,35.814) 25.654,29.291 R6.1@25.692,29.253
  Bottom Layer w0.203: J1.5@25.654,34.925 v1(25.654,35.814)
NetR15_1: R15.1 U8.7 | length 4.7
  Bottom Layer w0.381: U8.7@9.431,20.422 12.751,20.422 13.119,20.053 R15.1@13.119,19.177
NEUTRAL: N.1 R9.2 U1.16 U4.2 | length 10
  Top Layer w0.203: U4.2@22.25,17.69 22.25,19.544 R9.2@22.236,19.558 v1(23.165,19.558)
  Bottom Layer w0.203: N.1@23.165,20.904 v1(23.165,19.558) 27.457,19.558 27.844,19.944 U1.16@27.844,21.002
nRESET: C6.1 R5.1 R6.2 TP2.1 U1.4 | length 10.2
  Top Layer w0.203: TP2.1@27.292,23.431 R5.1@27.292,25.697 ; R6.2@27.292,29.253 R5.1@27.292,25.697 ; v2(28.245,24.714) 28.245,25.425 27.973,25.697 R5.1@27.292,25.697
  Bottom Layer w0.203: U1.4@27.194,26.902 27.194,25.765 v2(28.245,24.714)
REVERSE: R3.2 R.1 U1.13 U2.2 | length 13.6
  Top Layer w0.203: v2(29.515,22.911) 29.605,23.001 32.04,23.001 32.806,22.236 R3.2@32.806,19.126 ; U2.2@31.35,17.69 32.32,17.69 32.806,18.175 R3.2@32.806,19.126 ; v2(31.801,19.126) R3.2@32.806,19.126
  Bottom Layer w0.203: v2(29.515,22.911) 29.794,22.632 U1.13@29.794,21.002 ; v2(31.801,19.126) 32.029,18.898 R.1@32.918,18.898
S1: S1.1 U1.14 U10.2 | length 9.5
  Top Layer w0.203: v2(28.677,13.411) 27.432,14.656 27.432,17.907 v2(29.134,19.609)
  Bottom Layer w0.203: v2(28.677,13.411) U10.2@29.402,13.411 ; v2(29.134,19.609) 29.134,20.992 U1.14@29.144,21.002
S2: R27.1 S2.1 U1.11 U10.5 | length 10.5
  Bottom Layer w0.203: U10.5@31.252,13.411 31.852,13.411 32.055,13.614 32.055,15.926 31.2,16.781 S2.1@31.2,17.496 31.094,17.602 U1.11@31.094,21.002 32.523,21.002 R27.1@32.773,20.752
S3: R28.1 S3.1 U1.12 U9.5 | length 19
  Top Layer w0.203: v2(19.558,20.574) 19.85,20.866 23.129,20.866 23.548,20.447 S3.1@24.841,20.447 28.499,20.447 v2(30.444,22.392)
  Bottom Layer w0.203: U9.5@18.78,18.593 19.489,18.593 20.18,19.284 20.18,19.952 v2(19.558,20.574) ; U1.12@30.444,21.002 v2(30.444,22.392) 31.71,22.392 31.928,22.174 R28.1@32.773,22.174
S4: S4.1 U1.15 U9.2 | length 18.2
  Top Layer w0.203: v2(16.154,17.856) 16.154,19.781 17.913,21.539 23.644,21.539 S4.1@24.613,22.508 24.621,22.499 v2(28.494,22.499)
  Bottom Layer w0.203: v2(16.154,17.856) 16.154,18.263 16.485,18.593 U9.2@16.93,18.593 ; U1.15@28.494,21.002 v2(28.494,22.499)
SIGNAL1: A1.1 C23.2 D11.2 FB3.2 J3.4 | length 14.6
  Top Layer w0.203: J3.4@21.653,2.603 24.752,2.603 25.125,2.976 D11.2@25.125,7.442 25.138,7.43 C23.2@26.746,7.43 26.759,7.442 v2(28.092,7.442)
  Bottom Layer w0.203: FB3.2@27.155,10.566 27.155,8.52 A1.1@27.144,8.509 27.144,8.391 v2(28.092,7.442)
SIGNAL2: A2.1 C21.2 D5.2 FB4.2 J3.5 | length 12.7
  Top Layer w0.203: J3.5@19.113,2.603 20.302,3.792 20.302,5.834 20.774,6.306 21.8,6.306 22.175,6.681 D5.2@22.175,7.442 23.343,8.61 C21.2@23.355,8.61 23.38,8.585 v2(24.435,8.585)
  Bottom Layer w0.203: FB4.2@23.447,10.744 23.447,8.522 A2.1@23.442,8.517 24.367,8.517 v2(24.435,8.585)
SIGNAL3: A3.1 C20.2 D4.2 FB6.2 J3.6 | length 13
  Top Layer w0.203: v2(14.986,9.017) 14.999,9.03 C20.2@16.231,9.03 ; C20.2@16.256,9.03 16.256,7.46 D4.2@16.274,7.442 17.907,5.809 17.907,3.048 17.462,2.603 J3.6@16.573,2.603
  Bottom Layer w0.203: v2(14.986,9.017) 15.486,8.517 A3.1@16.256,8.517 ; A3.1@16.259,8.52 FB6.2@16.259,10.566
SIGNAL4: A4.1 C22.2 D10.2 FB5.2 J3.2 | length 8.3
  Top Layer w0.203: J3.2@19.113,5.143 19.225,5.255 D10.2@19.225,7.442 19.241,7.458 C22.2@19.241,8.712 19.241,8.737 v2(20.803,8.738)
  Bottom Layer w0.203: FB5.2@19.84,10.566 19.84,8.52 A4.1@19.837,8.517 20.582,8.517 v2(20.803,8.738)
SWIM: J1.3 U1.18 | length 17.2
  Top Layer w0.203: v1(24.384,35.814) 24.384,31.896 23.698,31.21 23.698,25.324 v2(25.781,23.241)
  Bottom Layer w0.203: J1.3@24.384,34.925 v1(24.384,35.814) ; v2(25.781,23.241) 26.544,22.478 U1.18@26.544,21.002